# EAGLE board SparkFun_Qwiic_FS3000-Panel (EAGLE 9.6.2), part 1 of 3
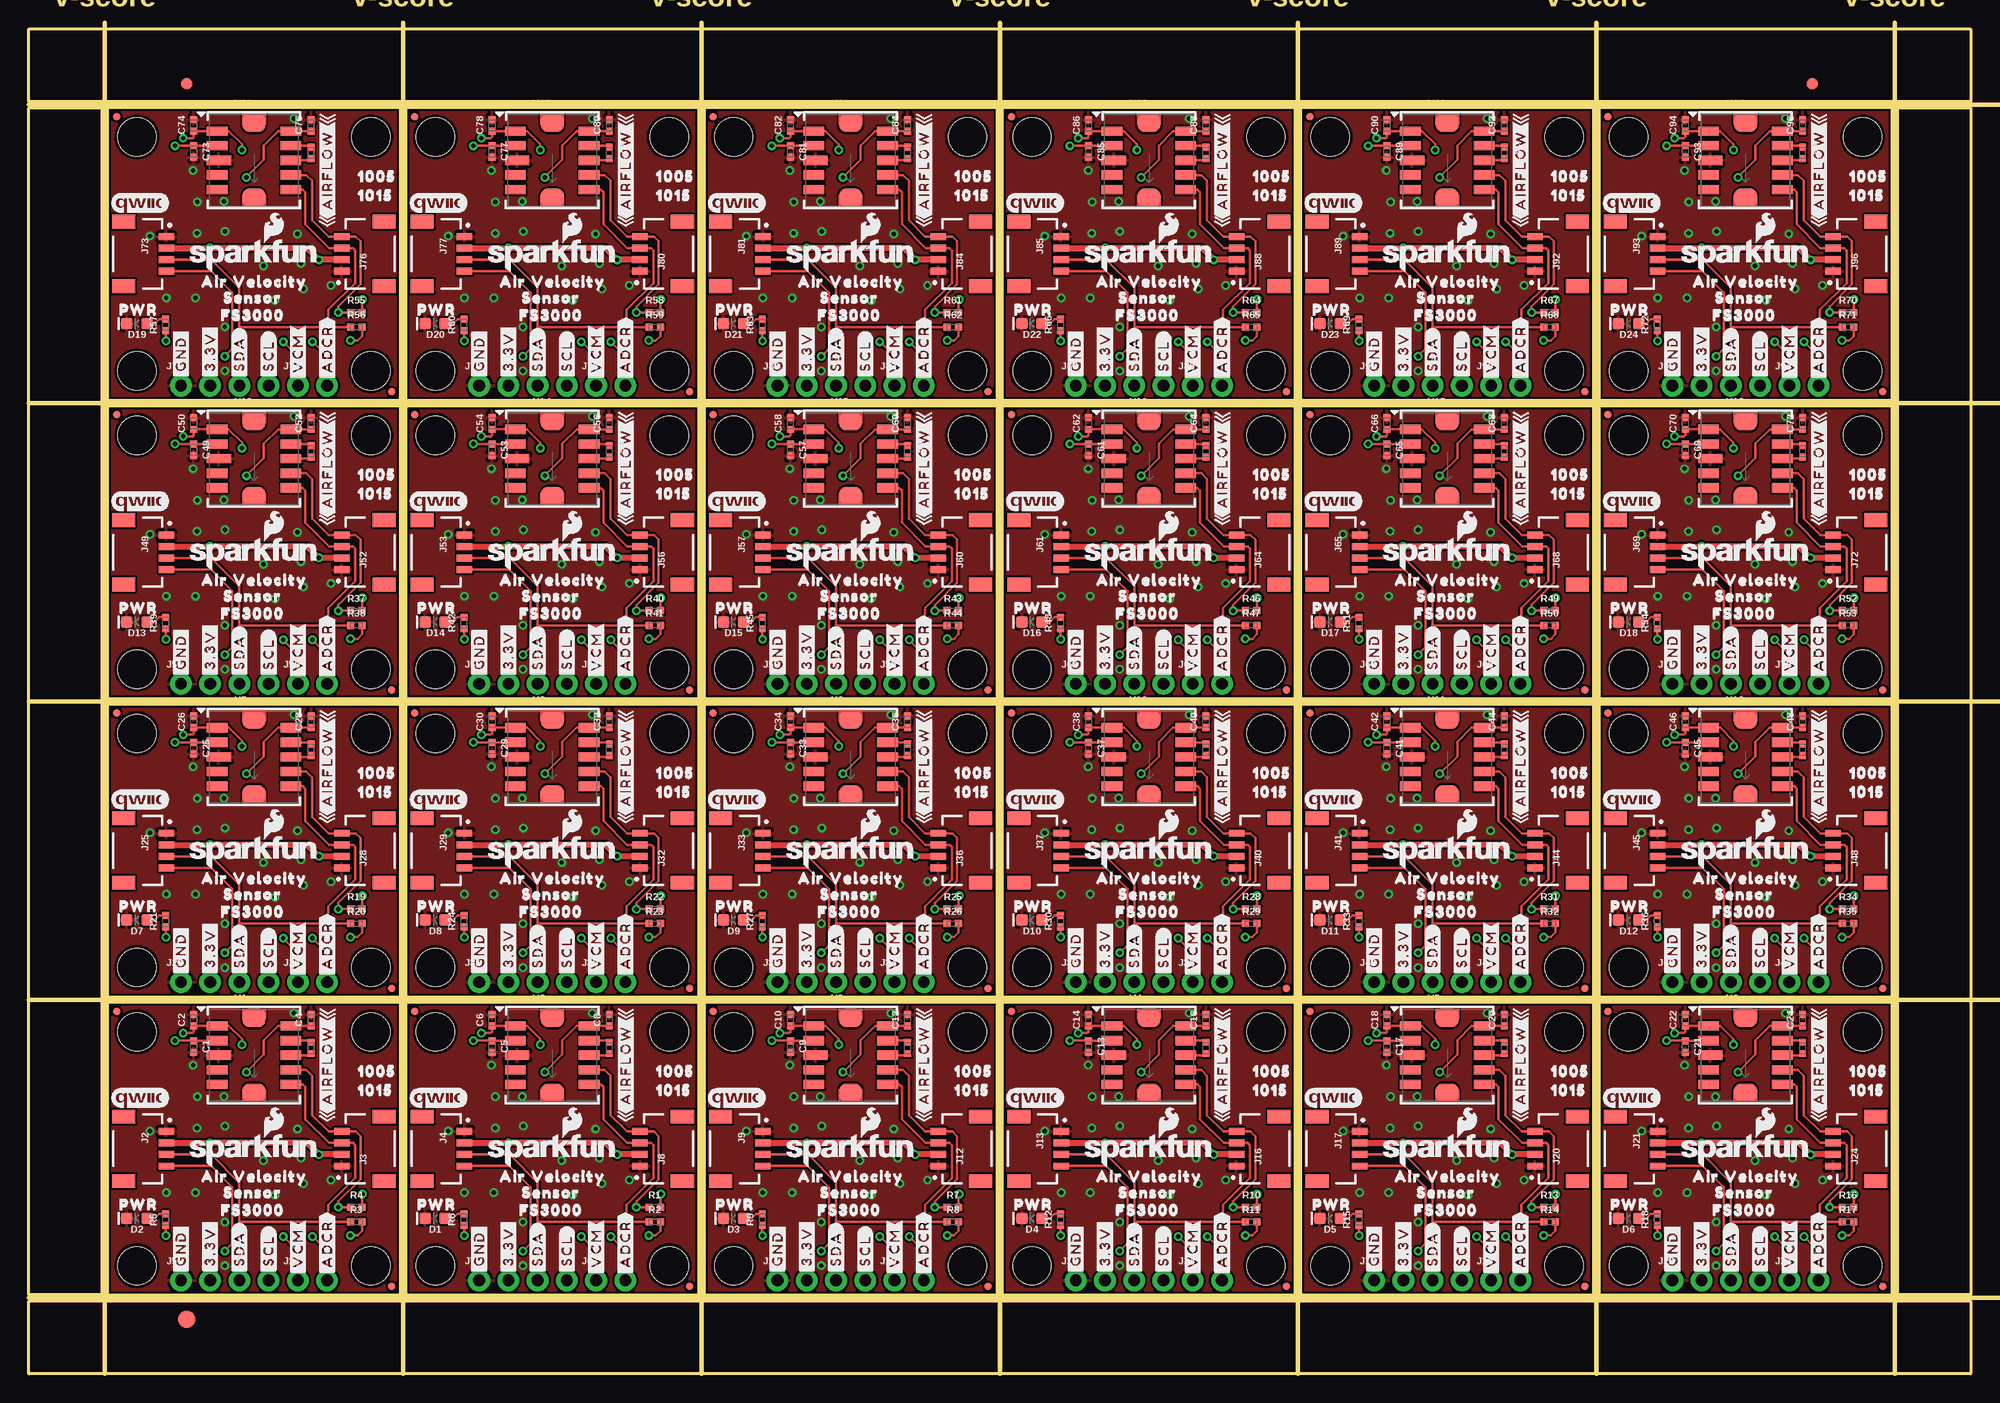
[diagram p0: board, top side]
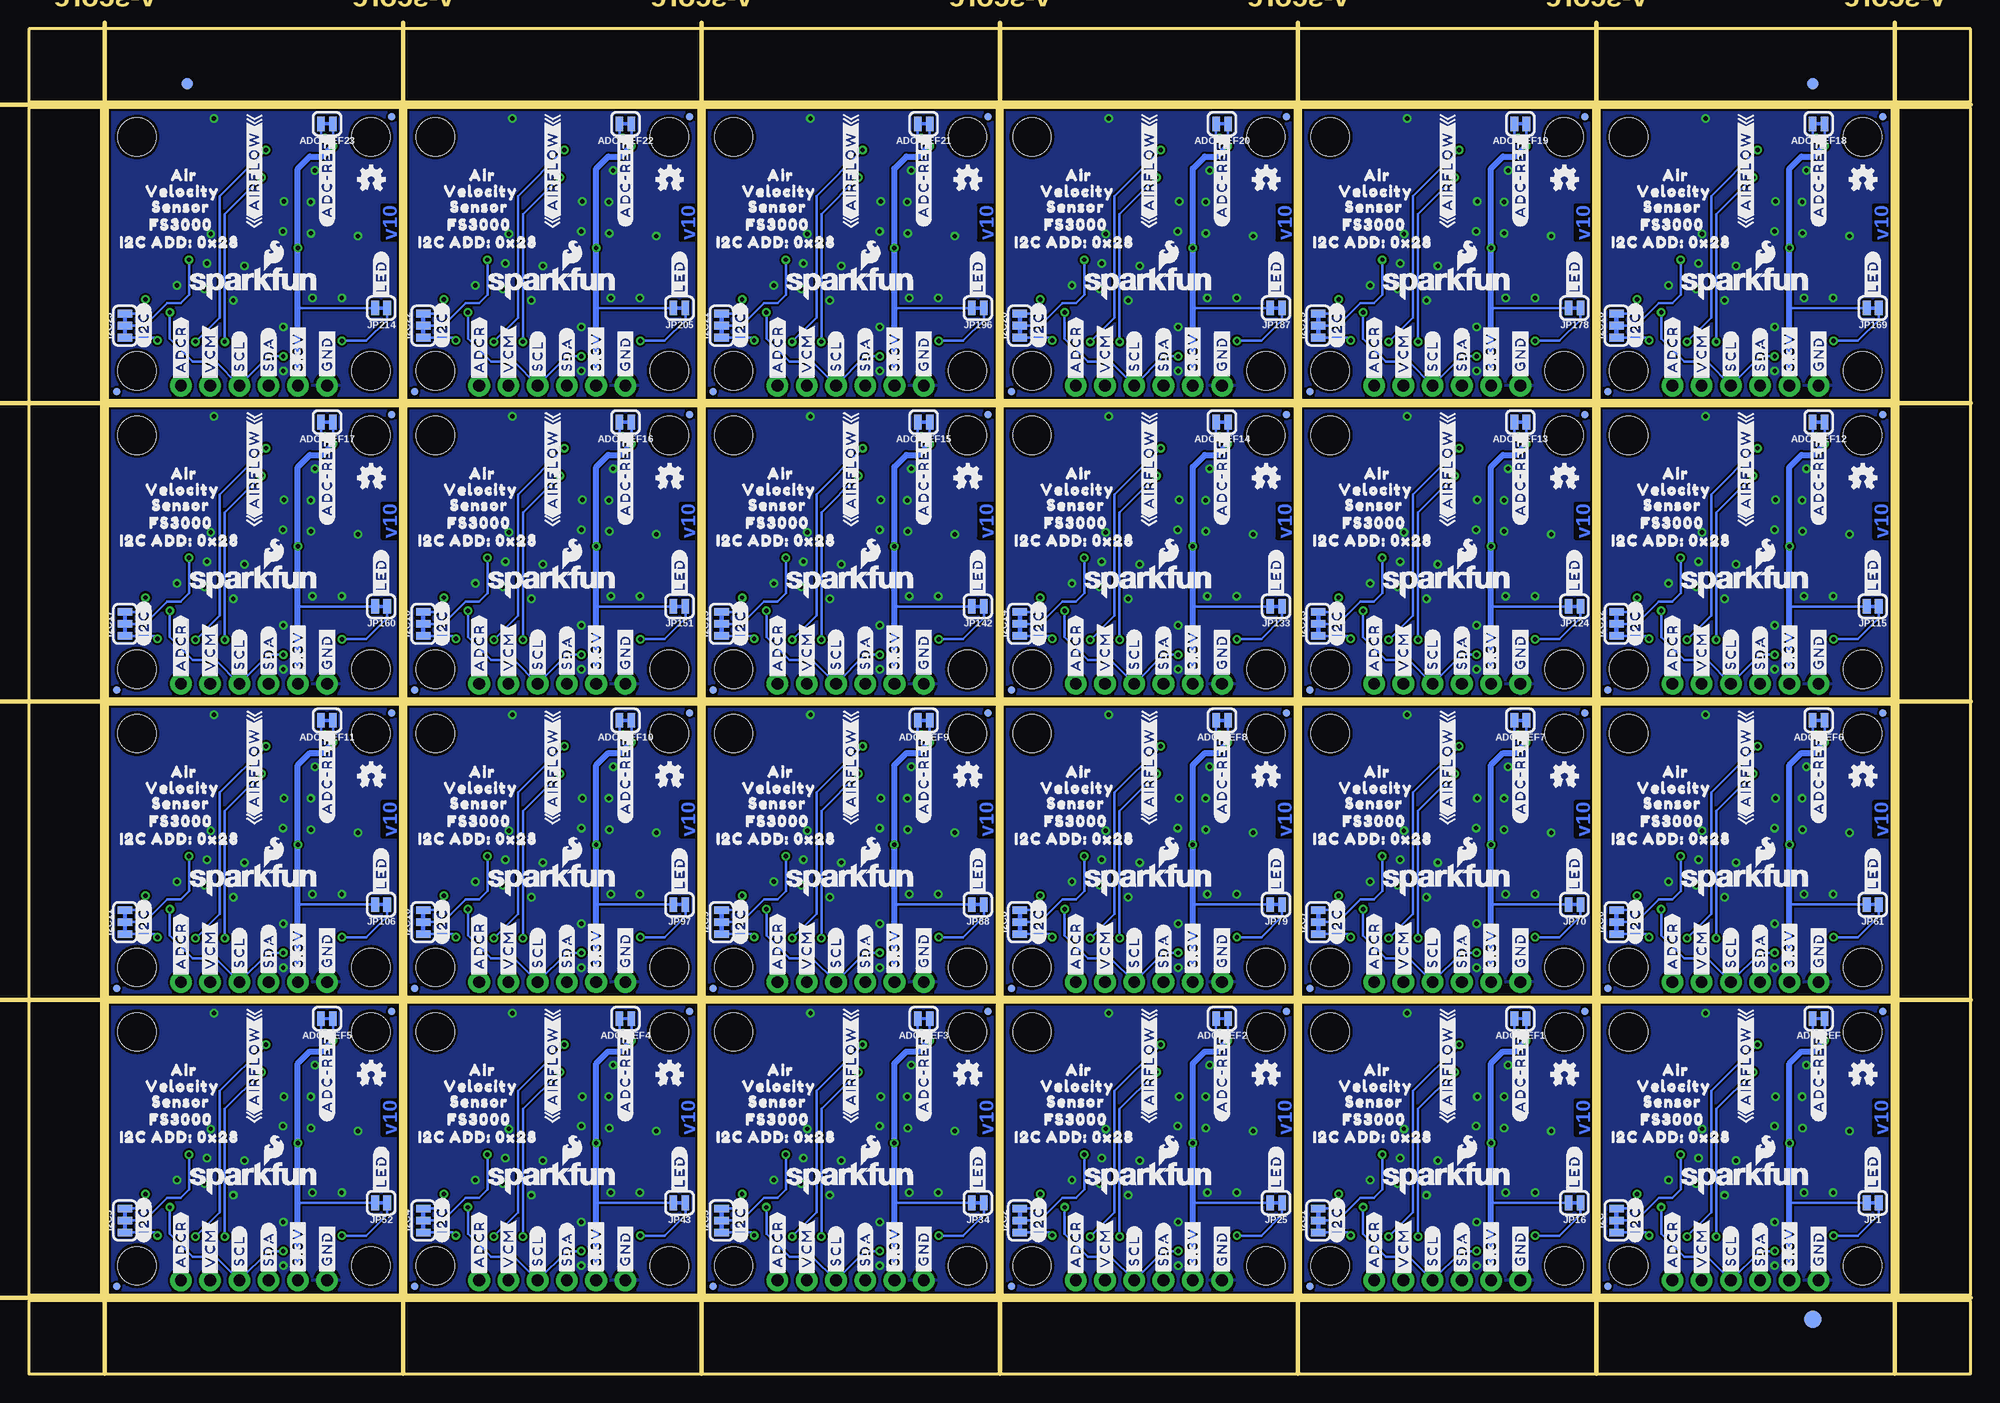
[diagram p1: board, bottom side, seen from below]

Size 168.66 x 116.84 mm. Coordinates in mm from the lower left corner, seen from the top.
Outline: 6.86,6.86 6.86,32.26 32.26,32.26 32.26,6.86 6.86,6.86
Outline: 32.77,6.86 32.77,32.26 58.17,32.26 58.17,6.86 32.77,6.86
Outline: 58.67,6.86 58.67,32.26 84.07,32.26 84.07,6.86 58.67,6.86
Outline: 84.58,6.86 84.58,32.26 109.98,32.26 109.98,6.86 84.58,6.86
Outline: 110.49,6.86 110.49,32.26 135.89,32.26 135.89,6.86 110.49,6.86
Outline: 136.4,6.86 136.4,32.26 161.8,32.26 161.8,6.86 136.4,6.86
Outline: 6.86,32.77 6.86,58.17 32.26,58.17 32.26,32.77 6.86,32.77
Outline: 32.77,32.77 32.77,58.17 58.17,58.17 58.17,32.77 32.77,32.77
Outline: 58.67,32.77 58.67,58.17 84.07,58.17 84.07,32.77 58.67,32.77
Outline: 84.58,32.77 84.58,58.17 109.98,58.17 109.98,32.77 84.58,32.77
Outline: 110.49,32.77 110.49,58.17 135.89,58.17 135.89,32.77 110.49,32.77
Outline: 136.4,32.77 136.4,58.17 161.8,58.17 161.8,32.77 136.4,32.77
Outline: 6.86,58.67 6.86,84.07 32.26,84.07 32.26,58.67 6.86,58.67
Outline: 32.77,58.67 32.77,84.07 58.17,84.07 58.17,58.67 32.77,58.67
Outline: 58.67,58.67 58.67,84.07 84.07,84.07 84.07,58.67 58.67,58.67
Outline: 84.58,58.67 84.58,84.07 109.98,84.07 109.98,58.67 84.58,58.67
Outline: 110.49,58.67 110.49,84.07 135.89,84.07 135.89,58.67 110.49,58.67
Outline: 136.4,58.67 136.4,84.07 161.8,84.07 161.8,58.67 136.4,58.67
Outline: 6.86,84.58 6.86,109.98 32.26,109.98 32.26,84.58 6.86,84.58
Outline: 32.77,84.58 32.77,109.98 58.17,109.98 58.17,84.58 32.77,84.58
Outline: 58.67,84.58 58.67,109.98 84.07,109.98 84.07,84.58 58.67,84.58
Outline: 84.58,84.58 84.58,109.98 109.98,109.98 109.98,84.58 84.58,84.58
Outline: 110.49,84.58 110.49,109.98 135.89,109.98 135.89,84.58 110.49,84.58
Outline: 136.4,84.58 136.4,109.98 161.8,109.98 161.8,84.58 136.4,84.58
Outline: 0,6.35 168.66,6.35 168.66,0 0,0 0,6.35
Outline: 162.31,109.98 168.66,109.98 168.66,6.86 162.31,6.86 162.31,109.98
Outline: 0,116.84 168.66,116.84 168.66,110.49 0,110.49 0,116.84
Outline: 0,109.98 6.35,109.98 6.35,6.86 0,6.86 0,109.98
Copper layers (1*16): Top 0.035mm / dielectric 1.5mm / Bottom 0.035mm
Design rules "SparkFun_Qwiic_FS3000": minimum track width 7mil, minimum drill 0.3mm, track to track 7mil, track to pad 7mil, pad to pad 7mil, via to via 7mil, smd to smd 7mil, copper to edge 7mil, drill to drill 7mil, minimum pad ring 7mil, minimum via ring 7mil, stop-mask expansion 3mil, vias tented up to drill 25mil, thermal gap 10mil
Milling: 12 lines

## Footprints (pad centres in the part's own frame; a part is rotated, then mirrored left to right if it is on the bottom)
SMT-JUMPER_2_NC_TRACE_SILK = smd 0.66 x 1.27: 1 -0.521,0; 2 0.521,0
0402-TIGHT = smd 0.6 x 0.6: 1 -0.5,0; 2 0.5,0
LED-0603 = smd 1 x 1: A -0.877,0; C 0.877,0
FIDUCIAL-1X2 = smd 1 x 1: 1 0,0
FIDUCIAL-1.5X3 = smd 1.5 x 1.5: 1 0,0
SMT-JUMPER_3_2-NC_TRACE_SILK = smd 0.66 x 1.27: 1 -1.041,0; 2 0,0; 3 1.041,0
1X02_NO_SILK = drill 1.016 pad 1.88: 1 0,0; 2 2.54,0
JST04_1MM_RA = smd 0.6 x 1.35: 1 -1.5,0; 2 -0.5,0; 3 0.5,0; 4 1.5,0 | smd 1.2 x 2: NC1 2.8,-3.675; NC2 -2.8,-3.675
1X04_NO_SILK = drill 1.016 pad 1.88: 1 0,0; 2 2.54,0; 3 5.08,0; 4 7.62,0
FIDUCIAL-MICRO = smd 0.635 x 0.635: 1 0,0
STAND-OFF = hole 3.302: 0,0
FS3000 = smd 1.8 x 0.8: 1 -3.2,2.54; 2 -3.2,1.27; 4 -3.2,-1.27; 5 -3.2,-2.54; 6 3.2,-2.54; 7 3.2,-1.27; 8 3.2,0; 9 3.2,1.27; 10 3.2,2.54 | smd 2.1 x 0.8: 3 -3.05,0 | smd 2 x 1.59: 11 0,-3.24; 12 0,3.24

## Placement (x,y rotation side)
ADC-REF  [SMT-JUMPER_2_NC_TRACE_SILK]  13.21,30.86 180 bottom
ADC-REF1  [SMT-JUMPER_2_NC_TRACE_SILK]  39.12,30.86 180 bottom
ADC-REF2  [SMT-JUMPER_2_NC_TRACE_SILK]  65.02,30.86 180 bottom
ADC-REF3  [SMT-JUMPER_2_NC_TRACE_SILK]  90.93,30.86 180 bottom
ADC-REF4  [SMT-JUMPER_2_NC_TRACE_SILK]  116.84,30.86 180 bottom
ADC-REF5  [SMT-JUMPER_2_NC_TRACE_SILK]  142.75,30.86 180 bottom
ADC-REF6  [SMT-JUMPER_2_NC_TRACE_SILK]  13.21,56.77 180 bottom
ADC-REF7  [SMT-JUMPER_2_NC_TRACE_SILK]  39.12,56.77 180 bottom
ADC-REF8  [SMT-JUMPER_2_NC_TRACE_SILK]  65.02,56.77 180 bottom
ADC-REF9  [SMT-JUMPER_2_NC_TRACE_SILK]  90.93,56.77 180 bottom
ADC-REF10  [SMT-JUMPER_2_NC_TRACE_SILK]  116.84,56.77 180 bottom
ADC-REF11  [SMT-JUMPER_2_NC_TRACE_SILK]  142.75,56.77 180 bottom
ADC-REF12  [SMT-JUMPER_2_NC_TRACE_SILK]  13.21,82.68 180 bottom
ADC-REF13  [SMT-JUMPER_2_NC_TRACE_SILK]  39.12,82.68 180 bottom
ADC-REF14  [SMT-JUMPER_2_NC_TRACE_SILK]  65.02,82.68 180 bottom
ADC-REF15  [SMT-JUMPER_2_NC_TRACE_SILK]  90.93,82.68 180 bottom
ADC-REF16  [SMT-JUMPER_2_NC_TRACE_SILK]  116.84,82.68 180 bottom
ADC-REF17  [SMT-JUMPER_2_NC_TRACE_SILK]  142.75,82.68 180 bottom
ADC-REF18  [SMT-JUMPER_2_NC_TRACE_SILK]  13.21,108.59 180 bottom
ADC-REF19  [SMT-JUMPER_2_NC_TRACE_SILK]  39.12,108.59 180 bottom
ADC-REF20  [SMT-JUMPER_2_NC_TRACE_SILK]  65.02,108.59 180 bottom
ADC-REF21  [SMT-JUMPER_2_NC_TRACE_SILK]  90.93,108.59 180 bottom
ADC-REF22  [SMT-JUMPER_2_NC_TRACE_SILK]  116.84,108.59 180 bottom
ADC-REF23  [SMT-JUMPER_2_NC_TRACE_SILK]  142.75,108.59 180 bottom
C1  0.1uF  [0402-TIGHT]  14.33,28.45 270 top
C2  0.1uF  [0402-TIGHT]  14.33,30.73 90 top
C3  0.1uF  [0402-TIGHT]  24.51,28.32 270 top
C4  1.0uF  [0402-TIGHT]  24.51,30.73 90 top
C5  0.1uF  [0402-TIGHT]  40.23,28.45 270 top
C6  0.1uF  [0402-TIGHT]  40.23,30.73 90 top
C7  0.1uF  [0402-TIGHT]  50.42,28.32 270 top
C8  1.0uF  [0402-TIGHT]  50.42,30.73 90 top
C9  0.1uF  [0402-TIGHT]  66.14,28.45 270 top
C10  0.1uF  [0402-TIGHT]  66.14,30.73 90 top
C11  0.1uF  [0402-TIGHT]  76.33,28.32 270 top
C12  1.0uF  [0402-TIGHT]  76.33,30.73 90 top
C13  0.1uF  [0402-TIGHT]  92.05,28.45 270 top
C14  0.1uF  [0402-TIGHT]  92.05,30.73 90 top
C15  0.1uF  [0402-TIGHT]  102.23,28.32 270 top
C16  1.0uF  [0402-TIGHT]  102.23,30.73 90 top
C17  0.1uF  [0402-TIGHT]  117.96,28.45 270 top
C18  0.1uF  [0402-TIGHT]  117.96,30.73 90 top
C19  0.1uF  [0402-TIGHT]  128.14,28.32 270 top
C20  1.0uF  [0402-TIGHT]  128.14,30.73 90 top
C21  0.1uF  [0402-TIGHT]  143.87,28.45 270 top
C22  0.1uF  [0402-TIGHT]  143.87,30.73 90 top
C23  0.1uF  [0402-TIGHT]  154.05,28.32 270 top
C24  1.0uF  [0402-TIGHT]  154.05,30.73 90 top
C25  0.1uF  [0402-TIGHT]  14.33,54.36 270 top
C26  0.1uF  [0402-TIGHT]  14.33,56.64 90 top
C27  0.1uF  [0402-TIGHT]  24.51,54.23 270 top
C28  1.0uF  [0402-TIGHT]  24.51,56.64 90 top
C29  0.1uF  [0402-TIGHT]  40.23,54.36 270 top
C30  0.1uF  [0402-TIGHT]  40.23,56.64 90 top
C31  0.1uF  [0402-TIGHT]  50.42,54.23 270 top
C32  1.0uF  [0402-TIGHT]  50.42,56.64 90 top
C33  0.1uF  [0402-TIGHT]  66.14,54.36 270 top
C34  0.1uF  [0402-TIGHT]  66.14,56.64 90 top
C35  0.1uF  [0402-TIGHT]  76.33,54.23 270 top
C36  1.0uF  [0402-TIGHT]  76.33,56.64 90 top
C37  0.1uF  [0402-TIGHT]  92.05,54.36 270 top
C38  0.1uF  [0402-TIGHT]  92.05,56.64 90 top
C39  0.1uF  [0402-TIGHT]  102.23,54.23 270 top
C40  1.0uF  [0402-TIGHT]  102.23,56.64 90 top
C41  0.1uF  [0402-TIGHT]  117.96,54.36 270 top
C42  0.1uF  [0402-TIGHT]  117.96,56.64 90 top
C43  0.1uF  [0402-TIGHT]  128.14,54.23 270 top
C44  1.0uF  [0402-TIGHT]  128.14,56.64 90 top
C45  0.1uF  [0402-TIGHT]  143.87,54.36 270 top
C46  0.1uF  [0402-TIGHT]  143.87,56.64 90 top
C47  0.1uF  [0402-TIGHT]  154.05,54.23 270 top
C48  1.0uF  [0402-TIGHT]  154.05,56.64 90 top
C49  0.1uF  [0402-TIGHT]  14.33,80.26 270 top
C50  0.1uF  [0402-TIGHT]  14.33,82.55 90 top
C51  0.1uF  [0402-TIGHT]  24.51,80.14 270 top
C52  1.0uF  [0402-TIGHT]  24.51,82.55 90 top
C53  0.1uF  [0402-TIGHT]  40.23,80.26 270 top
C54  0.1uF  [0402-TIGHT]  40.23,82.55 90 top
C55  0.1uF  [0402-TIGHT]  50.42,80.14 270 top
C56  1.0uF  [0402-TIGHT]  50.42,82.55 90 top
C57  0.1uF  [0402-TIGHT]  66.14,80.26 270 top
C58  0.1uF  [0402-TIGHT]  66.14,82.55 90 top
C59  0.1uF  [0402-TIGHT]  76.33,80.14 270 top
C60  1.0uF  [0402-TIGHT]  76.33,82.55 90 top
C61  0.1uF  [0402-TIGHT]  92.05,80.26 270 top
C62  0.1uF  [0402-TIGHT]  92.05,82.55 90 top
C63  0.1uF  [0402-TIGHT]  102.23,80.14 270 top
C64  1.0uF  [0402-TIGHT]  102.23,82.55 90 top
C65  0.1uF  [0402-TIGHT]  117.96,80.26 270 top
C66  0.1uF  [0402-TIGHT]  117.96,82.55 90 top
C67  0.1uF  [0402-TIGHT]  128.14,80.14 270 top
C68  1.0uF  [0402-TIGHT]  128.14,82.55 90 top
C69  0.1uF  [0402-TIGHT]  143.87,80.26 270 top
C70  0.1uF  [0402-TIGHT]  143.87,82.55 90 top
C71  0.1uF  [0402-TIGHT]  154.05,80.14 270 top
C72  1.0uF  [0402-TIGHT]  154.05,82.55 90 top
C73  0.1uF  [0402-TIGHT]  14.33,106.17 270 top
C74  0.1uF  [0402-TIGHT]  14.33,108.46 90 top
C75  0.1uF  [0402-TIGHT]  24.51,106.05 270 top
C76  1.0uF  [0402-TIGHT]  24.51,108.46 90 top
C77  0.1uF  [0402-TIGHT]  40.23,106.17 270 top
C78  0.1uF  [0402-TIGHT]  40.23,108.46 90 top
C79  0.1uF  [0402-TIGHT]  50.42,106.05 270 top
C80  1.0uF  [0402-TIGHT]  50.42,108.46 90 top
C81  0.1uF  [0402-TIGHT]  66.14,106.17 270 top
C82  0.1uF  [0402-TIGHT]  66.14,108.46 90 top
C83  0.1uF  [0402-TIGHT]  76.33,106.05 270 top
C84  1.0uF  [0402-TIGHT]  76.33,108.46 90 top
C85  0.1uF  [0402-TIGHT]  92.05,106.17 270 top
C86  0.1uF  [0402-TIGHT]  92.05,108.46 90 top
C87  0.1uF  [0402-TIGHT]  102.23,106.05 270 top
C88  1.0uF  [0402-TIGHT]  102.23,108.46 90 top
C89  0.1uF  [0402-TIGHT]  117.96,106.17 270 top
C90  0.1uF  [0402-TIGHT]  117.96,108.46 90 top
C91  0.1uF  [0402-TIGHT]  128.14,106.05 270 top
C92  1.0uF  [0402-TIGHT]  128.14,108.46 90 top
C93  0.1uF  [0402-TIGHT]  143.87,106.17 270 top
C94  0.1uF  [0402-TIGHT]  143.87,108.46 90 top
C95  0.1uF  [0402-TIGHT]  154.05,106.05 270 top
C96  1.0uF  [0402-TIGHT]  154.05,108.46 90 top
D1  RED  [LED-0603]  35.31,13.51 180 top
D2  RED  [LED-0603]  9.4,13.51 180 top
D3  RED  [LED-0603]  61.21,13.51 180 top
D4  RED  [LED-0603]  87.12,13.51 180 top
D5  RED  [LED-0603]  113.03,13.51 180 top
D6  RED  [LED-0603]  138.94,13.51 180 top
D7  RED  [LED-0603]  9.4,39.42 180 top
D8  RED  [LED-0603]  35.31,39.42 180 top
D9  RED  [LED-0603]  61.21,39.42 180 top
D10  RED  [LED-0603]  87.12,39.42 180 top
D11  RED  [LED-0603]  113.03,39.42 180 top
D12  RED  [LED-0603]  138.94,39.42 180 top
D13  RED  [LED-0603]  9.4,65.33 180 top
D14  RED  [LED-0603]  35.31,65.33 180 top
D15  RED  [LED-0603]  61.21,65.33 180 top
D16  RED  [LED-0603]  87.12,65.33 180 top
D17  RED  [LED-0603]  113.03,65.33 180 top
D18  RED  [LED-0603]  138.94,65.33 180 top
D19  RED  [LED-0603]  9.4,91.24 180 top
D20  RED  [LED-0603]  35.31,91.24 180 top
D21  RED  [LED-0603]  61.21,91.24 180 top
D22  RED  [LED-0603]  87.12,91.24 180 top
D23  RED  [LED-0603]  113.03,91.24 180 top
D24  RED  [LED-0603]  138.94,91.24 180 top
E$1  [FIDUCIAL-1X2]  13.72,112.08 0 top
E$2  [FIDUCIAL-1X2]  13.72,112.08 0 bottom
E$3  [FIDUCIAL-1X2]  154.88,112.08 0 top
E$4  [FIDUCIAL-1X2]  154.88,112.08 0 bottom
E$5  [FIDUCIAL-1.5X3]  13.72,4.76 0 top
E$6  [FIDUCIAL-1.5X3]  13.72,4.76 0 bottom
I2C  [SMT-JUMPER_3_2-NC_TRACE_SILK]  30.76,13.34 90 bottom
I2C1  [SMT-JUMPER_3_2-NC_TRACE_SILK]  56.67,13.34 90 bottom
I2C2  [SMT-JUMPER_3_2-NC_TRACE_SILK]  82.58,13.34 90 bottom
I2C3  [SMT-JUMPER_3_2-NC_TRACE_SILK]  108.48,13.34 90 bottom
I2C4  [SMT-JUMPER_3_2-NC_TRACE_SILK]  134.39,13.34 90 bottom
I2C5  [SMT-JUMPER_3_2-NC_TRACE_SILK]  160.3,13.34 90 bottom
I2C6  [SMT-JUMPER_3_2-NC_TRACE_SILK]  30.76,39.24 90 bottom
I2C7  [SMT-JUMPER_3_2-NC_TRACE_SILK]  56.67,39.24 90 bottom
I2C8  [SMT-JUMPER_3_2-NC_TRACE_SILK]  82.58,39.24 90 bottom
I2C9  [SMT-JUMPER_3_2-NC_TRACE_SILK]  108.48,39.24 90 bottom
I2C10  [SMT-JUMPER_3_2-NC_TRACE_SILK]  134.39,39.24 90 bottom
I2C11  [SMT-JUMPER_3_2-NC_TRACE_SILK]  160.3,39.24 90 bottom
I2C12  [SMT-JUMPER_3_2-NC_TRACE_SILK]  30.76,65.15 90 bottom
I2C13  [SMT-JUMPER_3_2-NC_TRACE_SILK]  56.67,65.15 90 bottom
I2C14  [SMT-JUMPER_3_2-NC_TRACE_SILK]  82.58,65.15 90 bottom
I2C15  [SMT-JUMPER_3_2-NC_TRACE_SILK]  108.48,65.15 90 bottom
I2C16  [SMT-JUMPER_3_2-NC_TRACE_SILK]  134.39,65.15 90 bottom
I2C17  [SMT-JUMPER_3_2-NC_TRACE_SILK]  160.3,65.15 90 bottom
I2C18  [SMT-JUMPER_3_2-NC_TRACE_SILK]  30.76,91.06 90 bottom
I2C19  [SMT-JUMPER_3_2-NC_TRACE_SILK]  56.67,91.06 90 bottom
I2C20  [SMT-JUMPER_3_2-NC_TRACE_SILK]  82.58,91.06 90 bottom
I2C21  [SMT-JUMPER_3_2-NC_TRACE_SILK]  108.48,91.06 90 bottom
I2C22  [SMT-JUMPER_3_2-NC_TRACE_SILK]  134.39,91.06 90 bottom
I2C23  [SMT-JUMPER_3_2-NC_TRACE_SILK]  160.3,91.06 90 bottom
J1  [1X02_NO_SILK]  23.37,8.13 0 top
J2  QWIIC_RA  [JST04_1MM_RA]  11.94,19.56 270 top
J3  QWIIC_RA  [JST04_1MM_RA]  27.18,19.56 90 top
J4  QWIIC_RA  [JST04_1MM_RA]  37.85,19.56 270 top
J5  [1X04_NO_SILK]  13.21,8.13 0 top
J6  [1X02_NO_SILK]  49.28,8.13 0 top
J7  [1X04_NO_SILK]  39.12,8.13 0 top
J8  QWIIC_RA  [JST04_1MM_RA]  53.09,19.56 90 top
J9  QWIIC_RA  [JST04_1MM_RA]  63.75,19.56 270 top
J10  [1X02_NO_SILK]  75.18,8.13 0 top
J11  [1X04_NO_SILK]  65.02,8.13 0 top
J12  QWIIC_RA  [JST04_1MM_RA]  78.99,19.56 90 top
J13  QWIIC_RA  [JST04_1MM_RA]  89.66,19.56 270 top
J14  [1X02_NO_SILK]  101.09,8.13 0 top
J15  [1X04_NO_SILK]  90.93,8.13 0 top
J16  QWIIC_RA  [JST04_1MM_RA]  104.9,19.56 90 top
J17  QWIIC_RA  [JST04_1MM_RA]  115.57,19.56 270 top
J18  [1X02_NO_SILK]  127,8.13 0 top
J19  [1X04_NO_SILK]  116.84,8.13 0 top
J20  QWIIC_RA  [JST04_1MM_RA]  130.81,19.56 90 top
J21  QWIIC_RA  [JST04_1MM_RA]  141.48,19.56 270 top
J22  [1X02_NO_SILK]  152.91,8.13 0 top
J23  [1X04_NO_SILK]  142.75,8.13 0 top
J24  QWIIC_RA  [JST04_1MM_RA]  156.72,19.56 90 top
J25  QWIIC_RA  [JST04_1MM_RA]  11.94,45.47 270 top
J26  [1X02_NO_SILK]  23.37,34.04 0 top
J27  [1X04_NO_SILK]  13.21,34.04 0 top
J28  QWIIC_RA  [JST04_1MM_RA]  27.18,45.47 90 top
J29  QWIIC_RA  [JST04_1MM_RA]  37.85,45.47 270 top
J30  [1X02_NO_SILK]  49.28,34.04 0 top
J31  [1X04_NO_SILK]  39.12,34.04 0 top
J32  QWIIC_RA  [JST04_1MM_RA]  53.09,45.47 90 top
J33  QWIIC_RA  [JST04_1MM_RA]  63.75,45.47 270 top
J34  [1X02_NO_SILK]  75.18,34.04 0 top
J35  [1X04_NO_SILK]  65.02,34.04 0 top
J36  QWIIC_RA  [JST04_1MM_RA]  78.99,45.47 90 top
J37  QWIIC_RA  [JST04_1MM_RA]  89.66,45.47 270 top
J38  [1X02_NO_SILK]  101.09,34.04 0 top
J39  [1X04_NO_SILK]  90.93,34.04 0 top
J40  QWIIC_RA  [JST04_1MM_RA]  104.9,45.47 90 top
J41  QWIIC_RA  [JST04_1MM_RA]  115.57,45.47 270 top
J42  [1X02_NO_SILK]  127,34.04 0 top
J43  [1X04_NO_SILK]  116.84,34.04 0 top
J44  QWIIC_RA  [JST04_1MM_RA]  130.81,45.47 90 top
J45  QWIIC_RA  [JST04_1MM_RA]  141.48,45.47 270 top
J46  [1X02_NO_SILK]  152.91,34.04 0 top
J47  [1X04_NO_SILK]  142.75,34.04 0 top
J48  QWIIC_RA  [JST04_1MM_RA]  156.72,45.47 90 top
J49  QWIIC_RA  [JST04_1MM_RA]  11.94,71.37 270 top
J50  [1X02_NO_SILK]  23.37,59.94 0 top
J51  [1X04_NO_SILK]  13.21,59.94 0 top
J52  QWIIC_RA  [JST04_1MM_RA]  27.18,71.37 90 top
J53  QWIIC_RA  [JST04_1MM_RA]  37.85,71.37 270 top
J54  [1X02_NO_SILK]  49.28,59.94 0 top
J55  [1X04_NO_SILK]  39.12,59.94 0 top
J56  QWIIC_RA  [JST04_1MM_RA]  53.09,71.37 90 top
J57  QWIIC_RA  [JST04_1MM_RA]  63.75,71.37 270 top
J58  [1X02_NO_SILK]  75.18,59.94 0 top
J59  [1X04_NO_SILK]  65.02,59.94 0 top
J60  QWIIC_RA  [JST04_1MM_RA]  78.99,71.37 90 top
J61  QWIIC_RA  [JST04_1MM_RA]  89.66,71.37 270 top
J62  [1X02_NO_SILK]  101.09,59.94 0 top
J63  [1X04_NO_SILK]  90.93,59.94 0 top
J64  QWIIC_RA  [JST04_1MM_RA]  104.9,71.37 90 top
J65  QWIIC_RA  [JST04_1MM_RA]  115.57,71.37 270 top
J66  [1X02_NO_SILK]  127,59.94 0 top
J67  [1X04_NO_SILK]  116.84,59.94 0 top
J68  QWIIC_RA  [JST04_1MM_RA]  130.81,71.37 90 top
J69  QWIIC_RA  [JST04_1MM_RA]  141.48,71.37 270 top
J70  [1X02_NO_SILK]  152.91,59.94 0 top
J71  [1X04_NO_SILK]  142.75,59.94 0 top
J72  QWIIC_RA  [JST04_1MM_RA]  156.72,71.37 90 top
J73  QWIIC_RA  [JST04_1MM_RA]  11.94,97.28 270 top
J74  [1X02_NO_SILK]  23.37,85.85 0 top
J75  [1X04_NO_SILK]  13.21,85.85 0 top
J76  QWIIC_RA  [JST04_1MM_RA]  27.18,97.28 90 top
J77  QWIIC_RA  [JST04_1MM_RA]  37.85,97.28 270 top
J78  [1X02_NO_SILK]  49.28,85.85 0 top
J79  [1X04_NO_SILK]  39.12,85.85 0 top
J80  QWIIC_RA  [JST04_1MM_RA]  53.09,97.28 90 top
J81  QWIIC_RA  [JST04_1MM_RA]  63.75,97.28 270 top
J82  [1X02_NO_SILK]  75.18,85.85 0 top
J83  [1X04_NO_SILK]  65.02,85.85 0 top
J84  QWIIC_RA  [JST04_1MM_RA]  78.99,97.28 90 top
J85  QWIIC_RA  [JST04_1MM_RA]  89.66,97.28 270 top
J86  [1X02_NO_SILK]  101.09,85.85 0 top
J87  [1X04_NO_SILK]  90.93,85.85 0 top
J88  QWIIC_RA  [JST04_1MM_RA]  104.9,97.28 90 top
J89  QWIIC_RA  [JST04_1MM_RA]  115.57,97.28 270 top
J90  [1X02_NO_SILK]  127,85.85 0 top
J91  [1X04_NO_SILK]  116.84,85.85 0 top
J92  QWIIC_RA  [JST04_1MM_RA]  130.81,97.28 90 top
J93  QWIIC_RA  [JST04_1MM_RA]  141.48,97.28 270 top
J94  [1X02_NO_SILK]  152.91,85.85 0 top
J95  [1X04_NO_SILK]  142.75,85.85 0 top
J96  QWIIC_RA  [JST04_1MM_RA]  156.72,97.28 90 top
JP1  LED  [SMT-JUMPER_2_NC_TRACE_SILK]  8.51,14.86 180 bottom
JP2  FIDUCIALUFIDUCIAL  [FIDUCIAL-MICRO]  31.5,7.59 0 top
JP3  STAND-OFF  [STAND-OFF]  9.4,29.72 0 top
JP4  STAND-OFF  [STAND-OFF]  29.72,29.72 0 top
JP5  FIDUCIALUFIDUCIAL  [FIDUCIAL-MICRO]  7.62,31.5 0 bottom
JP6  FIDUCIALUFIDUCIAL  [FIDUCIAL-MICRO]  7.62,31.5 0 top
JP7  STAND-OFF  [STAND-OFF]  29.72,9.4 0 top
JP8  STAND-OFF  [STAND-OFF]  9.4,9.4 0 top
JP9  STAND-OFF  [STAND-OFF]  35.31,29.72 0 top
JP10  FIDUCIALUFIDUCIAL  [FIDUCIAL-MICRO]  57.4,7.59 0 top
JP11  FIDUCIALUFIDUCIAL  [FIDUCIAL-MICRO]  31.5,7.59 0 bottom
JP12  FIDUCIALUFIDUCIAL  [FIDUCIAL-MICRO]  33.53,31.5 0 top
JP13  FIDUCIALUFIDUCIAL  [FIDUCIAL-MICRO]  57.4,7.59 0 bottom
JP14  FIDUCIALUFIDUCIAL  [FIDUCIAL-MICRO]  33.53,31.5 0 bottom
JP15  STAND-OFF  [STAND-OFF]  35.31,9.4 0 top
JP16  LED  [SMT-JUMPER_2_NC_TRACE_SILK]  34.42,14.86 180 bottom
JP17  STAND-OFF  [STAND-OFF]  55.63,29.72 0 top
JP18  STAND-OFF  [STAND-OFF]  55.63,9.4 0 top
JP19  STAND-OFF  [STAND-OFF]  61.21,29.72 0 top
JP20  FIDUCIALUFIDUCIAL  [FIDUCIAL-MICRO]  83.31,7.59 0 top
JP21  FIDUCIALUFIDUCIAL  [FIDUCIAL-MICRO]  59.44,31.5 0 top
JP22  FIDUCIALUFIDUCIAL  [FIDUCIAL-MICRO]  83.31,7.59 0 bottom
JP23  FIDUCIALUFIDUCIAL  [FIDUCIAL-MICRO]  59.44,31.5 0 bottom
JP24  STAND-OFF  [STAND-OFF]  61.21,9.4 0 top
JP25  LED  [SMT-JUMPER_2_NC_TRACE_SILK]  60.32,14.86 180 bottom
JP26  STAND-OFF  [STAND-OFF]  81.53,29.72 0 top
JP27  STAND-OFF  [STAND-OFF]  81.53,9.4 0 top
JP28  STAND-OFF  [STAND-OFF]  87.12,29.72 0 top
JP29  FIDUCIALUFIDUCIAL  [FIDUCIAL-MICRO]  109.22,7.59 0 top
JP30  FIDUCIALUFIDUCIAL  [FIDUCIAL-MICRO]  85.34,31.5 0 top
JP31  FIDUCIALUFIDUCIAL  [FIDUCIAL-MICRO]  109.22,7.59 0 bottom
JP32  FIDUCIALUFIDUCIAL  [FIDUCIAL-MICRO]  85.34,31.5 0 bottom
JP33  STAND-OFF  [STAND-OFF]  87.12,9.4 0 top
JP34  LED  [SMT-JUMPER_2_NC_TRACE_SILK]  86.23,14.86 180 bottom
JP35  STAND-OFF  [STAND-OFF]  107.44,29.72 0 top
JP36  STAND-OFF  [STAND-OFF]  107.44,9.4 0 top
JP37  STAND-OFF  [STAND-OFF]  113.03,29.72 0 top
JP38  FIDUCIALUFIDUCIAL  [FIDUCIAL-MICRO]  135.13,7.59 0 top
JP39  FIDUCIALUFIDUCIAL  [FIDUCIAL-MICRO]  111.25,31.5 0 top
JP40  FIDUCIALUFIDUCIAL  [FIDUCIAL-MICRO]  135.13,7.59 0 bottom
JP41  FIDUCIALUFIDUCIAL  [FIDUCIAL-MICRO]  111.25,31.5 0 bottom
JP42  STAND-OFF  [STAND-OFF]  113.03,9.4 0 top
JP43  LED  [SMT-JUMPER_2_NC_TRACE_SILK]  112.14,14.86 180 bottom
JP44  STAND-OFF  [STAND-OFF]  133.35,29.72 0 top
JP45  STAND-OFF  [STAND-OFF]  133.35,9.4 0 top
JP46  STAND-OFF  [STAND-OFF]  138.94,29.72 0 top
JP47  FIDUCIALUFIDUCIAL  [FIDUCIAL-MICRO]  161.04,7.59 0 top
JP48  FIDUCIALUFIDUCIAL  [FIDUCIAL-MICRO]  137.16,31.5 0 top
JP49  FIDUCIALUFIDUCIAL  [FIDUCIAL-MICRO]  161.04,7.59 0 bottom
JP50  FIDUCIALUFIDUCIAL  [FIDUCIAL-MICRO]  137.16,31.5 0 bottom
JP51  STAND-OFF  [STAND-OFF]  138.94,9.4 0 top
JP52  LED  [SMT-JUMPER_2_NC_TRACE_SILK]  138.05,14.86 180 bottom
JP53  STAND-OFF  [STAND-OFF]  159.26,29.72 0 top
JP54  STAND-OFF  [STAND-OFF]  159.26,9.4 0 top
JP55  STAND-OFF  [STAND-OFF]  9.4,55.63 0 top
JP56  FIDUCIALUFIDUCIAL  [FIDUCIAL-MICRO]  31.5,33.5 0 top
JP57  FIDUCIALUFIDUCIAL  [FIDUCIAL-MICRO]  7.62,57.4 0 top
JP58  FIDUCIALUFIDUCIAL  [FIDUCIAL-MICRO]  31.5,33.5 0 bottom
JP59  FIDUCIALUFIDUCIAL  [FIDUCIAL-MICRO]  7.62,57.4 0 bottom
JP60  STAND-OFF  [STAND-OFF]  9.4,35.31 0 top
JP61  LED  [SMT-JUMPER_2_NC_TRACE_SILK]  8.51,40.77 180 bottom
JP62  STAND-OFF  [STAND-OFF]  29.72,55.63 0 top
JP63  STAND-OFF  [STAND-OFF]  29.72,35.31 0 top
JP64  STAND-OFF  [STAND-OFF]  35.31,55.63 0 top
JP65  FIDUCIALUFIDUCIAL  [FIDUCIAL-MICRO]  57.4,33.5 0 top
JP66  FIDUCIALUFIDUCIAL  [FIDUCIAL-MICRO]  33.53,57.4 0 top
JP67  FIDUCIALUFIDUCIAL  [FIDUCIAL-MICRO]  57.4,33.5 0 bottom
JP68  FIDUCIALUFIDUCIAL  [FIDUCIAL-MICRO]  33.53,57.4 0 bottom
JP69  STAND-OFF  [STAND-OFF]  35.31,35.31 0 top
JP70  LED  [SMT-JUMPER_2_NC_TRACE_SILK]  34.42,40.77 180 bottom
JP71  STAND-OFF  [STAND-OFF]  55.63,55.63 0 top
JP72  STAND-OFF  [STAND-OFF]  55.63,35.31 0 top
JP73  STAND-OFF  [STAND-OFF]  61.21,55.63 0 top
JP74  FIDUCIALUFIDUCIAL  [FIDUCIAL-MICRO]  83.31,33.5 0 top
JP75  FIDUCIALUFIDUCIAL  [FIDUCIAL-MICRO]  59.44,57.4 0 top
JP76  FIDUCIALUFIDUCIAL  [FIDUCIAL-MICRO]  83.31,33.5 0 bottom
JP77  FIDUCIALUFIDUCIAL  [FIDUCIAL-MICRO]  59.44,57.4 0 bottom
JP78  STAND-OFF  [STAND-OFF]  61.21,35.31 0 top
JP79  LED  [SMT-JUMPER_2_NC_TRACE_SILK]  60.32,40.77 180 bottom
JP80  STAND-OFF  [STAND-OFF]  81.53,55.63 0 top
JP81  STAND-OFF  [STAND-OFF]  81.53,35.31 0 top
JP82  STAND-OFF  [STAND-OFF]  87.12,55.63 0 top
JP83  FIDUCIALUFIDUCIAL  [FIDUCIAL-MICRO]  109.22,33.5 0 top
JP84  FIDUCIALUFIDUCIAL  [FIDUCIAL-MICRO]  85.34,57.4 0 top
JP85  FIDUCIALUFIDUCIAL  [FIDUCIAL-MICRO]  109.22,33.5 0 bottom
JP86  FIDUCIALUFIDUCIAL  [FIDUCIAL-MICRO]  85.34,57.4 0 bottom
JP87  STAND-OFF  [STAND-OFF]  87.12,35.31 0 top
JP88  LED  [SMT-JUMPER_2_NC_TRACE_SILK]  86.23,40.77 180 bottom
JP89  STAND-OFF  [STAND-OFF]  107.44,55.63 0 top
JP90  STAND-OFF  [STAND-OFF]  107.44,35.31 0 top
JP91  STAND-OFF  [STAND-OFF]  113.03,55.63 0 top
JP92  FIDUCIALUFIDUCIAL  [FIDUCIAL-MICRO]  135.13,33.5 0 top
JP93  FIDUCIALUFIDUCIAL  [FIDUCIAL-MICRO]  111.25,57.4 0 top
JP94  FIDUCIALUFIDUCIAL  [FIDUCIAL-MICRO]  135.13,33.5 0 bottom
JP95  FIDUCIALUFIDUCIAL  [FIDUCIAL-MICRO]  111.25,57.4 0 bottom
JP96  STAND-OFF  [STAND-OFF]  113.03,35.31 0 top
JP97  LED  [SMT-JUMPER_2_NC_TRACE_SILK]  112.14,40.77 180 bottom
JP98  STAND-OFF  [STAND-OFF]  133.35,55.63 0 top
JP99  STAND-OFF  [STAND-OFF]  133.35,35.31 0 top
JP100  STAND-OFF  [STAND-OFF]  138.94,55.63 0 top
JP101  FIDUCIALUFIDUCIAL  [FIDUCIAL-MICRO]  161.04,33.5 0 top
JP102  FIDUCIALUFIDUCIAL  [FIDUCIAL-MICRO]  137.16,57.4 0 top
JP103  FIDUCIALUFIDUCIAL  [FIDUCIAL-MICRO]  161.04,33.5 0 bottom
JP104  FIDUCIALUFIDUCIAL  [FIDUCIAL-MICRO]  137.16,57.4 0 bottom
JP105  STAND-OFF  [STAND-OFF]  138.94,35.31 0 top
JP106  LED  [SMT-JUMPER_2_NC_TRACE_SILK]  138.05,40.77 180 bottom
JP107  STAND-OFF  [STAND-OFF]  159.26,55.63 0 top
JP108  STAND-OFF  [STAND-OFF]  159.26,35.31 0 top
JP109  STAND-OFF  [STAND-OFF]  9.4,81.53 0 top
JP110  FIDUCIALUFIDUCIAL  [FIDUCIAL-MICRO]  31.5,59.41 0 top
JP111  FIDUCIALUFIDUCIAL  [FIDUCIAL-MICRO]  7.62,83.31 0 top
JP112  FIDUCIALUFIDUCIAL  [FIDUCIAL-MICRO]  31.5,59.41 0 bottom
JP113  FIDUCIALUFIDUCIAL  [FIDUCIAL-MICRO]  7.62,83.31 0 bottom
JP114  STAND-OFF  [STAND-OFF]  9.4,61.21 0 top
JP115  LED  [SMT-JUMPER_2_NC_TRACE_SILK]  8.51,66.67 180 bottom
JP116  STAND-OFF  [STAND-OFF]  29.72,81.53 0 top
JP117  STAND-OFF  [STAND-OFF]  29.72,61.21 0 top
JP118  STAND-OFF  [STAND-OFF]  35.31,81.53 0 top
JP119  FIDUCIALUFIDUCIAL  [FIDUCIAL-MICRO]  57.4,59.41 0 top
JP120  FIDUCIALUFIDUCIAL  [FIDUCIAL-MICRO]  33.53,83.31 0 top
JP121  FIDUCIALUFIDUCIAL  [FIDUCIAL-MICRO]  57.4,59.41 0 bottom
JP122  FIDUCIALUFIDUCIAL  [FIDUCIAL-MICRO]  33.53,83.31 0 bottom
JP123  STAND-OFF  [STAND-OFF]  35.31,61.21 0 top
JP124  LED  [SMT-JUMPER_2_NC_TRACE_SILK]  34.42,66.67 180 bottom
JP125  STAND-OFF  [STAND-OFF]  55.63,81.53 0 top
JP126  STAND-OFF  [STAND-OFF]  55.63,61.21 0 top
JP127  STAND-OFF  [STAND-OFF]  61.21,81.53 0 top
JP128  FIDUCIALUFIDUCIAL  [FIDUCIAL-MICRO]  83.31,59.41 0 top
JP129  FIDUCIALUFIDUCIAL  [FIDUCIAL-MICRO]  59.44,83.31 0 top
JP130  FIDUCIALUFIDUCIAL  [FIDUCIAL-MICRO]  83.31,59.41 0 bottom
JP131  FIDUCIALUFIDUCIAL  [FIDUCIAL-MICRO]  59.44,83.31 0 bottom
JP132  STAND-OFF  [STAND-OFF]  61.21,61.21 0 top
JP133  LED  [SMT-JUMPER_2_NC_TRACE_SILK]  60.32,66.67 180 bottom
JP134  STAND-OFF  [STAND-OFF]  81.53,81.53 0 top
JP135  STAND-OFF  [STAND-OFF]  81.53,61.21 0 top
JP136  STAND-OFF  [STAND-OFF]  87.12,81.53 0 top
JP137  FIDUCIALUFIDUCIAL  [FIDUCIAL-MICRO]  109.22,59.41 0 top
JP138  FIDUCIALUFIDUCIAL  [FIDUCIAL-MICRO]  85.34,83.31 0 top
JP139  FIDUCIALUFIDUCIAL  [FIDUCIAL-MICRO]  109.22,59.41 0 bottom
JP140  FIDUCIALUFIDUCIAL  [FIDUCIAL-MICRO]  85.34,83.31 0 bottom
JP141  STAND-OFF  [STAND-OFF]  87.12,61.21 0 top
JP142  LED  [SMT-JUMPER_2_NC_TRACE_SILK]  86.23,66.67 180 bottom
JP143  STAND-OFF  [STAND-OFF]  107.44,81.53 0 top
JP144  STAND-OFF  [STAND-OFF]  107.44,61.21 0 top
JP145  STAND-OFF  [STAND-OFF]  113.03,81.53 0 top
JP146  FIDUCIALUFIDUCIAL  [FIDUCIAL-MICRO]  135.13,59.41 0 top
JP147  FIDUCIALUFIDUCIAL  [FIDUCIAL-MICRO]  111.25,83.31 0 top
JP148  FIDUCIALUFIDUCIAL  [FIDUCIAL-MICRO]  135.13,59.41 0 bottom
JP149  FIDUCIALUFIDUCIAL  [FIDUCIAL-MICRO]  111.25,83.31 0 bottom
JP150  STAND-OFF  [STAND-OFF]  113.03,61.21 0 top
JP151  LED  [SMT-JUMPER_2_NC_TRACE_SILK]  112.14,66.67 180 bottom
JP152  STAND-OFF  [STAND-OFF]  133.35,81.53 0 top
JP153  STAND-OFF  [STAND-OFF]  133.35,61.21 0 top
JP154  STAND-OFF  [STAND-OFF]  138.94,81.53 0 top
JP155  FIDUCIALUFIDUCIAL  [FIDUCIAL-MICRO]  161.04,59.41 0 top
JP156  FIDUCIALUFIDUCIAL  [FIDUCIAL-MICRO]  137.16,83.31 0 top
JP157  FIDUCIALUFIDUCIAL  [FIDUCIAL-MICRO]  161.04,59.41 0 bottom
JP158  FIDUCIALUFIDUCIAL  [FIDUCIAL-MICRO]  137.16,83.31 0 bottom
JP159  STAND-OFF  [STAND-OFF]  138.94,61.21 0 top
JP160  LED  [SMT-JUMPER_2_NC_TRACE_SILK]  138.05,66.67 180 bottom
JP161  STAND-OFF  [STAND-OFF]  159.26,81.53 0 top
JP162  STAND-OFF  [STAND-OFF]  159.26,61.21 0 top
JP163  STAND-OFF  [STAND-OFF]  9.4,107.44 0 top
JP164  FIDUCIALUFIDUCIAL  [FIDUCIAL-MICRO]  31.5,85.32 0 top
JP165  FIDUCIALUFIDUCIAL  [FIDUCIAL-MICRO]  7.62,109.22 0 top
JP166  FIDUCIALUFIDUCIAL  [FIDUCIAL-MICRO]  31.5,85.32 0 bottom
JP167  FIDUCIALUFIDUCIAL  [FIDUCIAL-MICRO]  7.62,109.22 0 bottom
JP168  STAND-OFF  [STAND-OFF]  9.4,87.12 0 top
JP169  LED  [SMT-JUMPER_2_NC_TRACE_SILK]  8.51,92.58 180 bottom
JP170  STAND-OFF  [STAND-OFF]  29.72,107.44 0 top
JP171  STAND-OFF  [STAND-OFF]  29.72,87.12 0 top
JP172  STAND-OFF  [STAND-OFF]  35.31,107.44 0 top
JP173  FIDUCIALUFIDUCIAL  [FIDUCIAL-MICRO]  57.4,85.32 0 top
JP174  FIDUCIALUFIDUCIAL  [FIDUCIAL-MICRO]  33.53,109.22 0 top
JP175  FIDUCIALUFIDUCIAL  [FIDUCIAL-MICRO]  57.4,85.32 0 bottom
JP176  FIDUCIALUFIDUCIAL  [FIDUCIAL-MICRO]  33.53,109.22 0 bottom
JP177  STAND-OFF  [STAND-OFF]  35.31,87.12 0 top
JP178  LED  [SMT-JUMPER_2_NC_TRACE_SILK]  34.42,92.58 180 bottom
JP179  STAND-OFF  [STAND-OFF]  55.63,107.44 0 top
JP180  STAND-OFF  [STAND-OFF]  55.63,87.12 0 top
JP181  STAND-OFF  [STAND-OFF]  61.21,107.44 0 top
JP182  FIDUCIALUFIDUCIAL  [FIDUCIAL-MICRO]  83.31,85.32 0 top
JP183  FIDUCIALUFIDUCIAL  [FIDUCIAL-MICRO]  59.44,109.22 0 top
JP184  FIDUCIALUFIDUCIAL  [FIDUCIAL-MICRO]  83.31,85.32 0 bottom
JP185  FIDUCIALUFIDUCIAL  [FIDUCIAL-MICRO]  59.44,109.22 0 bottom
JP186  STAND-OFF  [STAND-OFF]  61.21,87.12 0 top
JP187  LED  [SMT-JUMPER_2_NC_TRACE_SILK]  60.32,92.58 180 bottom
JP188  STAND-OFF  [STAND-OFF]  81.53,107.44 0 top
JP189  STAND-OFF  [STAND-OFF]  81.53,87.12 0 top
JP190  STAND-OFF  [STAND-OFF]  87.12,107.44 0 top
JP191  FIDUCIALUFIDUCIAL  [FIDUCIAL-MICRO]  109.22,85.32 0 top
JP192  FIDUCIALUFIDUCIAL  [FIDUCIAL-MICRO]  85.34,109.22 0 top
JP193  FIDUCIALUFIDUCIAL  [FIDUCIAL-MICRO]  109.22,85.32 0 bottom
JP194  FIDUCIALUFIDUCIAL  [FIDUCIAL-MICRO]  85.34,109.22 0 bottom
JP195  STAND-OFF  [STAND-OFF]  87.12,87.12 0 top
JP196  LED  [SMT-JUMPER_2_NC_TRACE_SILK]  86.23,92.58 180 bottom
JP197  STAND-OFF  [STAND-OFF]  107.44,107.44 0 top
JP198  STAND-OFF  [STAND-OFF]  107.44,87.12 0 top
JP199  STAND-OFF  [STAND-OFF]  113.03,107.44 0 top
JP200  FIDUCIALUFIDUCIAL  [FIDUCIAL-MICRO]  135.13,85.32 0 top
JP201  FIDUCIALUFIDUCIAL  [FIDUCIAL-MICRO]  111.25,109.22 0 top
JP202  FIDUCIALUFIDUCIAL  [FIDUCIAL-MICRO]  135.13,85.32 0 bottom
JP203  FIDUCIALUFIDUCIAL  [FIDUCIAL-MICRO]  111.25,109.22 0 bottom
JP204  STAND-OFF  [STAND-OFF]  113.03,87.12 0 top
JP205  LED  [SMT-JUMPER_2_NC_TRACE_SILK]  112.14,92.58 180 bottom
JP206  STAND-OFF  [STAND-OFF]  133.35,107.44 0 top
JP207  STAND-OFF  [STAND-OFF]  133.35,87.12 0 top
JP208  STAND-OFF  [STAND-OFF]  138.94,107.44 0 top
JP209  FIDUCIALUFIDUCIAL  [FIDUCIAL-MICRO]  161.04,85.32 0 top
JP210  FIDUCIALUFIDUCIAL  [FIDUCIAL-MICRO]  137.16,109.22 0 top
JP211  FIDUCIALUFIDUCIAL  [FIDUCIAL-MICRO]  161.04,85.32 0 bottom
JP212  FIDUCIALUFIDUCIAL  [FIDUCIAL-MICRO]  137.16,109.22 0 bottom
JP213  STAND-OFF  [STAND-OFF]  138.94,87.12 0 top
JP214  LED  [SMT-JUMPER_2_NC_TRACE_SILK]  138.05,92.58 180 bottom
JP215  STAND-OFF  [STAND-OFF]  159.26,107.44 0 top
JP216  STAND-OFF  [STAND-OFF]  159.26,87.12 0 top
LOGO1  OSHW-LOGOMINI  [OSHW-LOGO-MINI]  9.37,26.04 0 bottom
LOGO2  OSHW-LOGOMINI  [OSHW-LOGO-MINI]  35.28,26.04 0 bottom
LOGO3  SFE_LOGO_NAME_FLAME.1_INCH  [SFE_LOGO_NAME_FLAME_.1]  19.56,17.02 0 bottom
LOGO4  QWIIC_LOGO_5MM  [QWIIC_5MM]  9.65,24 0 top
LOGO5  SFE_LOGO_NAME_FLAME.1_INCH  [SFE_LOGO_NAME_FLAME_.1]  19.56,19.43 0 top
LOGO6  QWIIC_LOGO_5MM  [QWIIC_5MM]  35.56,24 0 top
LOGO7  SFE_LOGO_NAME_FLAME.1_INCH  [SFE_LOGO_NAME_FLAME_.1]  45.47,19.43 0 top
LOGO8  SFE_LOGO_NAME_FLAME.1_INCH  [SFE_LOGO_NAME_FLAME_.1]  45.47,17.02 0 bottom
LOGO9  OSHW-LOGOMINI  [OSHW-LOGO-MINI]  61.19,26.04 0 bottom
LOGO10  QWIIC_LOGO_5MM  [QWIIC_5MM]  61.47,24 0 top
LOGO11  SFE_LOGO_NAME_FLAME.1_INCH  [SFE_LOGO_NAME_FLAME_.1]  71.37,19.43 0 top
LOGO12  SFE_LOGO_NAME_FLAME.1_INCH  [SFE_LOGO_NAME_FLAME_.1]  71.37,17.02 0 bottom
LOGO13  OSHW-LOGOMINI  [OSHW-LOGO-MINI]  87.1,26.04 0 bottom
LOGO14  QWIIC_LOGO_5MM  [QWIIC_5MM]  87.38,24 0 top
LOGO15  SFE_LOGO_NAME_FLAME.1_INCH  [SFE_LOGO_NAME_FLAME_.1]  97.28,19.43 0 top
LOGO16  SFE_LOGO_NAME_FLAME.1_INCH  [SFE_LOGO_NAME_FLAME_.1]  97.28,17.02 0 bottom
LOGO17  OSHW-LOGOMINI  [OSHW-LOGO-MINI]  113,26.04 0 bottom
LOGO18  QWIIC_LOGO_5MM  [QWIIC_5MM]  113.28,24 0 top
LOGO19  SFE_LOGO_NAME_FLAME.1_INCH  [SFE_LOGO_NAME_FLAME_.1]  123.19,19.43 0 top
LOGO20  SFE_LOGO_NAME_FLAME.1_INCH  [SFE_LOGO_NAME_FLAME_.1]  123.19,17.02 0 bottom
LOGO21  OSHW-LOGOMINI  [OSHW-LOGO-MINI]  138.91,26.04 0 bottom
LOGO22  QWIIC_LOGO_5MM  [QWIIC_5MM]  139.19,24 0 top
LOGO23  SFE_LOGO_NAME_FLAME.1_INCH  [SFE_LOGO_NAME_FLAME_.1]  149.1,19.43 0 top
LOGO24  SFE_LOGO_NAME_FLAME.1_INCH  [SFE_LOGO_NAME_FLAME_.1]  149.1,17.02 0 bottom
LOGO25  OSHW-LOGOMINI  [OSHW-LOGO-MINI]  9.37,51.94 0 bottom
LOGO26  QWIIC_LOGO_5MM  [QWIIC_5MM]  9.65,49.91 0 top
LOGO27  SFE_LOGO_NAME_FLAME.1_INCH  [SFE_LOGO_NAME_FLAME_.1]  19.56,45.34 0 top
LOGO28  SFE_LOGO_NAME_FLAME.1_INCH  [SFE_LOGO_NAME_FLAME_.1]  19.56,42.93 0 bottom
LOGO29  OSHW-LOGOMINI  [OSHW-LOGO-MINI]  35.28,51.94 0 bottom
LOGO30  QWIIC_LOGO_5MM  [QWIIC_5MM]  35.56,49.91 0 top
LOGO31  SFE_LOGO_NAME_FLAME.1_INCH  [SFE_LOGO_NAME_FLAME_.1]  45.47,45.34 0 top
LOGO32  SFE_LOGO_NAME_FLAME.1_INCH  [SFE_LOGO_NAME_FLAME_.1]  45.47,42.93 0 bottom
LOGO33  OSHW-LOGOMINI  [OSHW-LOGO-MINI]  61.19,51.94 0 bottom
LOGO34  QWIIC_LOGO_5MM  [QWIIC_5MM]  61.47,49.91 0 top
LOGO35  SFE_LOGO_NAME_FLAME.1_INCH  [SFE_LOGO_NAME_FLAME_.1]  71.37,45.34 0 top
LOGO36  SFE_LOGO_NAME_FLAME.1_INCH  [SFE_LOGO_NAME_FLAME_.1]  71.37,42.93 0 bottom
LOGO37  OSHW-LOGOMINI  [OSHW-LOGO-MINI]  87.1,51.94 0 bottom
LOGO38  QWIIC_LOGO_5MM  [QWIIC_5MM]  87.38,49.91 0 top
LOGO39  SFE_LOGO_NAME_FLAME.1_INCH  [SFE_LOGO_NAME_FLAME_.1]  97.28,45.34 0 top
LOGO40  SFE_LOGO_NAME_FLAME.1_INCH  [SFE_LOGO_NAME_FLAME_.1]  97.28,42.93 0 bottom
LOGO41  OSHW-LOGOMINI  [OSHW-LOGO-MINI]  113,51.94 0 bottom
LOGO42  QWIIC_LOGO_5MM  [QWIIC_5MM]  113.28,49.91 0 top
LOGO43  SFE_LOGO_NAME_FLAME.1_INCH  [SFE_LOGO_NAME_FLAME_.1]  123.19,45.34 0 top
LOGO44  SFE_LOGO_NAME_FLAME.1_INCH  [SFE_LOGO_NAME_FLAME_.1]  123.19,42.93 0 bottom
LOGO45  OSHW-LOGOMINI  [OSHW-LOGO-MINI]  138.91,51.94 0 bottom
LOGO46  QWIIC_LOGO_5MM  [QWIIC_5MM]  139.19,49.91 0 top
LOGO47  SFE_LOGO_NAME_FLAME.1_INCH  [SFE_LOGO_NAME_FLAME_.1]  149.1,45.34 0 top
LOGO48  SFE_LOGO_NAME_FLAME.1_INCH  [SFE_LOGO_NAME_FLAME_.1]  149.1,42.93 0 bottom
LOGO49  OSHW-LOGOMINI  [OSHW-LOGO-MINI]  9.37,77.85 0 bottom
LOGO50  QWIIC_LOGO_5MM  [QWIIC_5MM]  9.65,75.82 0 top
LOGO51  SFE_LOGO_NAME_FLAME.1_INCH  [SFE_LOGO_NAME_FLAME_.1]  19.56,71.25 0 top
LOGO52  SFE_LOGO_NAME_FLAME.1_INCH  [SFE_LOGO_NAME_FLAME_.1]  19.56,68.83 0 bottom
LOGO53  OSHW-LOGOMINI  [OSHW-LOGO-MINI]  35.28,77.85 0 bottom
LOGO54  QWIIC_LOGO_5MM  [QWIIC_5MM]  35.56,75.82 0 top
LOGO55  SFE_LOGO_NAME_FLAME.1_INCH  [SFE_LOGO_NAME_FLAME_.1]  45.47,71.25 0 top
LOGO56  SFE_LOGO_NAME_FLAME.1_INCH  [SFE_LOGO_NAME_FLAME_.1]  45.47,68.83 0 bottom
LOGO57  OSHW-LOGOMINI  [OSHW-LOGO-MINI]  61.19,77.85 0 bottom
LOGO58  QWIIC_LOGO_5MM  [QWIIC_5MM]  61.47,75.82 0 top
LOGO59  SFE_LOGO_NAME_FLAME.1_INCH  [SFE_LOGO_NAME_FLAME_.1]  71.37,71.25 0 top
LOGO60  SFE_LOGO_NAME_FLAME.1_INCH  [SFE_LOGO_NAME_FLAME_.1]  71.37,68.83 0 bottom
LOGO61  OSHW-LOGOMINI  [OSHW-LOGO-MINI]  87.1,77.85 0 bottom
LOGO62  QWIIC_LOGO_5MM  [QWIIC_5MM]  87.38,75.82 0 top
LOGO63  SFE_LOGO_NAME_FLAME.1_INCH  [SFE_LOGO_NAME_FLAME_.1]  97.28,71.25 0 top
LOGO64  SFE_LOGO_NAME_FLAME.1_INCH  [SFE_LOGO_NAME_FLAME_.1]  97.28,68.83 0 bottom
LOGO65  OSHW-LOGOMINI  [OSHW-LOGO-MINI]  113,77.85 0 bottom
LOGO66  QWIIC_LOGO_5MM  [QWIIC_5MM]  113.28,75.82 0 top
LOGO67  SFE_LOGO_NAME_FLAME.1_INCH  [SFE_LOGO_NAME_FLAME_.1]  123.19,71.25 0 top
LOGO68  SFE_LOGO_NAME_FLAME.1_INCH  [SFE_LOGO_NAME_FLAME_.1]  123.19,68.83 0 bottom
LOGO69  OSHW-LOGOMINI  [OSHW-LOGO-MINI]  138.91,77.85 0 bottom
LOGO70  QWIIC_LOGO_5MM  [QWIIC_5MM]  139.19,75.82 0 top
LOGO71  SFE_LOGO_NAME_FLAME.1_INCH  [SFE_LOGO_NAME_FLAME_.1]  149.1,71.25 0 top
LOGO72  SFE_LOGO_NAME_FLAME.1_INCH  [SFE_LOGO_NAME_FLAME_.1]  149.1,68.83 0 bottom
LOGO73  OSHW-LOGOMINI  [OSHW-LOGO-MINI]  9.37,103.76 0 bottom
LOGO74  QWIIC_LOGO_5MM  [QWIIC_5MM]  9.65,101.73 0 top
LOGO75  SFE_LOGO_NAME_FLAME.1_INCH  [SFE_LOGO_NAME_FLAME_.1]  19.56,97.16 0 top
LOGO76  SFE_LOGO_NAME_FLAME.1_INCH  [SFE_LOGO_NAME_FLAME_.1]  19.56,94.74 0 bottom
LOGO77  OSHW-LOGOMINI  [OSHW-LOGO-MINI]  35.28,103.76 0 bottom
LOGO78  QWIIC_LOGO_5MM  [QWIIC_5MM]  35.56,101.73 0 top
LOGO79  SFE_LOGO_NAME_FLAME.1_INCH  [SFE_LOGO_NAME_FLAME_.1]  45.47,97.16 0 top
LOGO80  SFE_LOGO_NAME_FLAME.1_INCH  [SFE_LOGO_NAME_FLAME_.1]  45.47,94.74 0 bottom
LOGO81  OSHW-LOGOMINI  [OSHW-LOGO-MINI]  61.19,103.76 0 bottom
LOGO82  QWIIC_LOGO_5MM  [QWIIC_5MM]  61.47,101.73 0 top
LOGO83  SFE_LOGO_NAME_FLAME.1_INCH  [SFE_LOGO_NAME_FLAME_.1]  71.37,97.16 0 top
LOGO84  SFE_LOGO_NAME_FLAME.1_INCH  [SFE_LOGO_NAME_FLAME_.1]  71.37,94.74 0 bottom
LOGO85  OSHW-LOGOMINI  [OSHW-LOGO-MINI]  87.1,103.76 0 bottom
LOGO86  QWIIC_LOGO_5MM  [QWIIC_5MM]  87.38,101.73 0 top
LOGO87  SFE_LOGO_NAME_FLAME.1_INCH  [SFE_LOGO_NAME_FLAME_.1]  97.28,97.16 0 top
LOGO88  SFE_LOGO_NAME_FLAME.1_INCH  [SFE_LOGO_NAME_FLAME_.1]  97.28,94.74 0 bottom
LOGO89  OSHW-LOGOMINI  [OSHW-LOGO-MINI]  113,103.76 0 bottom
LOGO90  QWIIC_LOGO_5MM  [QWIIC_5MM]  113.28,101.73 0 top
LOGO91  SFE_LOGO_NAME_FLAME.1_INCH  [SFE_LOGO_NAME_FLAME_.1]  123.19,97.16 0 top
LOGO92  SFE_LOGO_NAME_FLAME.1_INCH  [SFE_LOGO_NAME_FLAME_.1]  123.19,94.74 0 bottom
LOGO93  OSHW-LOGOMINI  [OSHW-LOGO-MINI]  138.91,103.76 0 bottom
LOGO94  QWIIC_LOGO_5MM  [QWIIC_5MM]  139.19,101.73 0 top
LOGO95  SFE_LOGO_NAME_FLAME.1_INCH  [SFE_LOGO_NAME_FLAME_.1]  149.1,97.16 0 top
LOGO96  SFE_LOGO_NAME_FLAME.1_INCH  [SFE_LOGO_NAME_FLAME_.1]  149.1,94.74 0 bottom
R1  2.2k  [0402-TIGHT]  54.36,14.48 0 top
R2  2.2k  [0402-TIGHT]  54.36,13.21 0 top
R3  2.2k  [0402-TIGHT]  28.45,13.21 0 top
R4  2.2k  [0402-TIGHT]  28.45,14.48 0 top
R5  1k  [0402-TIGHT]  11.89,13.41 90 top
R6  1k  [0402-TIGHT]  37.8,13.41 90 top
R7  2.2k  [0402-TIGHT]  80.26,14.48 0 top
R8  2.2k  [0402-TIGHT]  80.26,13.21 0 top
R9  1k  [0402-TIGHT]  63.7,13.41 90 top
R10  2.2k  [0402-TIGHT]  106.17,14.48 0 top
R11  2.2k  [0402-TIGHT]  106.17,13.21 0 top
R12  1k  [0402-TIGHT]  89.61,13.41 90 top
R13  2.2k  [0402-TIGHT]  132.08,14.48 0 top
R14  2.2k  [0402-TIGHT]  132.08,13.21 0 top
R15  1k  [0402-TIGHT]  115.52,13.41 90 top
R16  2.2k  [0402-TIGHT]  157.99,14.48 0 top
R17  2.2k  [0402-TIGHT]  157.99,13.21 0 top
R18  1k  [0402-TIGHT]  141.43,13.41 90 top
R19  2.2k  [0402-TIGHT]  28.45,40.39 0 top
R20  2.2k  [0402-TIGHT]  28.45,39.12 0 top
R21  1k  [0402-TIGHT]  11.89,39.32 90 top
R22  2.2k  [0402-TIGHT]  54.36,40.39 0 top
R23  2.2k  [0402-TIGHT]  54.36,39.12 0 top
R24  1k  [0402-TIGHT]  37.8,39.32 90 top
R25  2.2k  [0402-TIGHT]  80.26,40.39 0 top
R26  2.2k  [0402-TIGHT]  80.26,39.12 0 top
R27  1k  [0402-TIGHT]  63.7,39.32 90 top
R28  2.2k  [0402-TIGHT]  106.17,40.39 0 top
R29  2.2k  [0402-TIGHT]  106.17,39.12 0 top
R30  1k  [0402-TIGHT]  89.61,39.32 90 top
R31  2.2k  [0402-TIGHT]  132.08,40.39 0 top
R32  2.2k  [0402-TIGHT]  132.08,39.12 0 top
R33  1k  [0402-TIGHT]  115.52,39.32 90 top
R34  2.2k  [0402-TIGHT]  157.99,40.39 0 top
R35  2.2k  [0402-TIGHT]  157.99,39.12 0 top
R36  1k  [0402-TIGHT]  141.43,39.32 90 top
R37  2.2k  [0402-TIGHT]  28.45,66.29 0 top
R38  2.2k  [0402-TIGHT]  28.45,65.02 0 top
R39  1k  [0402-TIGHT]  11.89,65.23 90 top
R40  2.2k  [0402-TIGHT]  54.36,66.29 0 top
R41  2.2k  [0402-TIGHT]  54.36,65.02 0 top
R42  1k  [0402-TIGHT]  37.8,65.23 90 top
R43  2.2k  [0402-TIGHT]  80.26,66.29 0 top
R44  2.2k  [0402-TIGHT]  80.26,65.02 0 top
R45  1k  [0402-TIGHT]  63.7,65.23 90 top
R46  2.2k  [0402-TIGHT]  106.17,66.29 0 top
R47  2.2k  [0402-TIGHT]  106.17,65.02 0 top
R48  1k  [0402-TIGHT]  89.61,65.23 90 top
R49  2.2k  [0402-TIGHT]  132.08,66.29 0 top
R50  2.2k  [0402-TIGHT]  132.08,65.02 0 top
R51  1k  [0402-TIGHT]  115.52,65.23 90 top
R52  2.2k  [0402-TIGHT]  157.99,66.29 0 top
R53  2.2k  [0402-TIGHT]  157.99,65.02 0 top
R54  1k  [0402-TIGHT]  141.43,65.23 90 top
R55  2.2k  [0402-TIGHT]  28.45,92.2 0 top
R56  2.2k  [0402-TIGHT]  28.45,90.93 0 top
R57  1k  [0402-TIGHT]  11.89,91.14 90 top
R58  2.2k  [0402-TIGHT]  54.36,92.2 0 top
R59  2.2k  [0402-TIGHT]  54.36,90.93 0 top
R60  1k  [0402-TIGHT]  37.8,91.14 90 top
R61  2.2k  [0402-TIGHT]  80.26,92.2 0 top
R62  2.2k  [0402-TIGHT]  80.26,90.93 0 top
R63  1k  [0402-TIGHT]  63.7,91.14 90 top
R64  2.2k  [0402-TIGHT]  106.17,92.2 0 top
R65  2.2k  [0402-TIGHT]  106.17,90.93 0 top
R66  1k  [0402-TIGHT]  89.61,91.14 90 top
R67  2.2k  [0402-TIGHT]  132.08,92.2 0 top
R68  2.2k  [0402-TIGHT]  132.08,90.93 0 top
R69  1k  [0402-TIGHT]  115.52,91.14 90 top
R70  2.2k  [0402-TIGHT]  157.99,92.2 0 top
R71  2.2k  [0402-TIGHT]  157.99,90.93 0 top
R72  1k  [0402-TIGHT]  141.43,91.14 90 top
U1  FS3000  [FS3000]  19.56,27.69 0 top
U2  FS3000  [FS3000]  45.47,27.69 0 top
U3  FS3000  [FS3000]  71.37,27.69 0 top
U4  FS3000  [FS3000]  97.28,27.69 0 top
U5  FS3000  [FS3000]  123.19,27.69 0 top
U6  FS3000  [FS3000]  149.1,27.69 0 top
U7  FS3000  [FS3000]  19.56,53.59 0 top
U8  FS3000  [FS3000]  45.47,53.59 0 top
U9  FS3000  [FS3000]  71.37,53.59 0 top
U10  FS3000  [FS3000]  97.28,53.59 0 top
U11  FS3000  [FS3000]  123.19,53.59 0 top
U12  FS3000  [FS3000]  149.1,53.59 0 top
U13  FS3000  [FS3000]  19.56,79.5 0 top
U14  FS3000  [FS3000]  45.47,79.5 0 top
U15  FS3000  [FS3000]  71.37,79.5 0 top
U16  FS3000  [FS3000]  97.28,79.5 0 top
U17  FS3000  [FS3000]  123.19,79.5 0 top
U18  FS3000  [FS3000]  149.1,79.5 0 top
U19  FS3000  [FS3000]  19.56,105.41 0 top
U20  FS3000  [FS3000]  45.47,105.41 0 top
U21  FS3000  [FS3000]  71.37,105.41 0 top
U22  FS3000  [FS3000]  97.28,105.41 0 top
U23  FS3000  [FS3000]  123.19,105.41 0 top
U24  FS3000  [FS3000]  149.1,105.41 0 top
U$1  [#GND#0]  39.12,8.64 90 top
U$2  [#GND#0]  39.12,8.64 90 bottom
U$3  [#SCL#0]  20.83,8.64 90 bottom
U$4  [#SDA#0]  18.29,8.64 90 bottom
U$5  [#GND#0]  13.21,8.64 90 top
U$6  [#GND#0]  13.21,8.64 90 bottom
U$7  [#3#3V#0]  15.75,8.64 90 top
U$8  [#3#3V#0]  15.75,8.64 90 bottom
U$9  [#SDA#0]  18.29,8.64 90 top
U$10  [#ADCR#4]  25.91,8.51 90 top
U$11  [#SCL#0]  20.83,8.64 90 top
U$12  [10050]  30.23,26.29 0 top
U$13  [#ADCR#4]  25.91,8.51 90 bottom
U$14  [FS30001]  19.43,14.22 0 top
U$15  [#ADC#REF#0]  13.21,30.1 90 bottom
U$16  [VELOCITY30003]  20.95,17.14 0 top
U$17  [FS30001]  25.91,22.1 0 bottom
U$18  [AIR30004]  16.13,17.14 0 top
U$19  [SENSOR30005]  19.43,15.75 0 top
U$20  [VELOCITY30003]  25.76,24.99 0 bottom
U$21  [AIR30004]  25.63,26.39 0 bottom
U$22  [SENSOR30005]  25.91,23.65 0 bottom
U$23  [#AIRFLOW#0]  25.93,26.82 90 top
U$24  [#LED#0]  8.51,15.49 90 bottom
U$25  [PWR0]  9.5,14.71 0 top
U$26  [#AIRFLOW#0]  19.53,26.77 90 bottom
U$27  [#I2C#0]  29.13,15.24 90 bottom
U$28  [I2C_ADD#_0X280]  26.04,20.57 0 bottom
U$29  [10150]  30.1,24.64 0 top
U$30  [#VCM#3]  23.37,8.51 90 top
U$31  [#VCM#3]  23.37,8.51 90 bottom
U$32  [#3#3V#0]  41.66,8.64 90 top
U$33  [#3#3V#0]  41.66,8.64 90 bottom
U$34  [#SDA#0]  44.2,8.64 90 top
U$35  [#SCL#0]  46.74,8.64 90 top
U$36  [#LED#0]  34.42,15.49 90 bottom
U$37  [PWR0]  35.41,14.71 0 top
U$38  [#I2C#0]  55.04,15.24 90 bottom
U$39  [#SCL#0]  46.74,8.64 90 bottom
U$40  [#SDA#0]  44.2,8.64 90 bottom
U$41  [FS30001]  45.34,14.22 0 top
U$42  [VELOCITY30003]  46.86,17.14 0 top
U$43  [AIR30004]  42.04,17.14 0 top
U$44  [SENSOR30005]  45.34,15.75 0 top
U$45  [#ADC#REF#0]  39.12,30.1 90 bottom
U$46  [FS30001]  51.82,22.1 0 bottom
U$47  [VELOCITY30003]  51.66,24.99 0 bottom
U$48  [AIR30004]  51.54,26.39 0 bottom
U$49  [SENSOR30005]  51.82,23.65 0 bottom
U$50  [#AIRFLOW#0]  51.84,26.82 90 top
U$51  [#AIRFLOW#0]  45.44,26.77 90 bottom
U$52  [I2C_ADD#_0X280]  51.94,20.57 0 bottom
U$53  [10050]  56.13,26.29 0 top
U$54  [10150]  56.01,24.64 0 top
U$55  [#ADCR#4]  51.82,8.51 90 top
U$56  [#ADCR#4]  51.82,8.51 90 bottom
U$57  [#VCM#3]  49.28,8.51 90 top
U$58  [#VCM#3]  49.28,8.51 90 bottom
U$59  [#GND#0]  65.02,8.64 90 top
U$60  [#GND#0]  65.02,8.64 90 bottom
U$61  [#3#3V#0]  67.56,8.64 90 top
U$62  [#3#3V#0]  67.56,8.64 90 bottom
U$63  [#SDA#0]  70.1,8.64 90 top
U$64  [#SCL#0]  72.64,8.64 90 top
U$65  [#LED#0]  60.32,15.49 90 bottom
U$66  [PWR0]  61.32,14.71 0 top
U$67  [#I2C#0]  80.95,15.24 90 bottom
U$68  [#SCL#0]  72.64,8.64 90 bottom
U$69  [#SDA#0]  70.1,8.64 90 bottom
U$70  [FS30001]  71.25,14.22 0 top
U$71  [VELOCITY30003]  72.77,17.14 0 top
U$72  [AIR30004]  67.95,17.14 0 top
U$73  [SENSOR30005]  71.25,15.75 0 top
U$74  [#ADC#REF#0]  65.02,30.1 90 bottom
U$75  [FS30001]  77.72,22.1 0 bottom
U$76  [VELOCITY30003]  77.57,24.99 0 bottom
U$77  [AIR30004]  77.44,26.39 0 bottom
U$78  [SENSOR30005]  77.72,23.65 0 bottom
U$79  [#AIRFLOW#0]  77.75,26.82 90 top
U$80  [#AIRFLOW#0]  71.35,26.77 90 bottom
U$81  [I2C_ADD#_0X280]  77.85,20.57 0 bottom
U$82  [10050]  82.04,26.29 0 top
U$83  [10150]  81.92,24.64 0 top
U$84  [#ADCR#4]  77.72,8.51 90 top
U$85  [#ADCR#4]  77.72,8.51 90 bottom
U$86  [#VCM#3]  75.18,8.51 90 top
U$87  [#VCM#3]  75.18,8.51 90 bottom
U$88  [#GND#0]  90.93,8.64 90 top
U$89  [#GND#0]  90.93,8.64 90 bottom
U$90  [#3#3V#0]  93.47,8.64 90 top
U$91  [#3#3V#0]  93.47,8.64 90 bottom
U$92  [#SDA#0]  96.01,8.64 90 top
U$93  [#SCL#0]  98.55,8.64 90 top
U$94  [#LED#0]  86.23,15.49 90 bottom
U$95  [PWR0]  87.22,14.71 0 top
U$96  [#I2C#0]  106.86,15.24 90 bottom
U$97  [#SCL#0]  98.55,8.64 90 bottom
U$98  [#SDA#0]  96.01,8.64 90 bottom
U$99  [FS30001]  97.16,14.22 0 top
U$100  [VELOCITY30003]  98.68,17.14 0 top
U$101  [AIR30004]  93.85,17.14 0 top
U$102  [SENSOR30005]  97.16,15.75 0 top
U$103  [#ADC#REF#0]  90.93,30.1 90 bottom
U$104  [FS30001]  103.63,22.1 0 bottom
U$105  [VELOCITY30003]  103.48,24.99 0 bottom
U$106  [AIR30004]  103.35,26.39 0 bottom
U$107  [SENSOR30005]  103.63,23.65 0 bottom
U$108  [#AIRFLOW#0]  103.66,26.82 90 top
U$109  [#AIRFLOW#0]  97.26,26.77 90 bottom
U$110  [I2C_ADD#_0X280]  103.76,20.57 0 bottom
U$111  [10050]  107.95,26.29 0 top
U$112  [10150]  107.82,24.64 0 top
U$113  [#ADCR#4]  103.63,8.51 90 top
U$114  [#ADCR#4]  103.63,8.51 90 bottom
U$115  [#VCM#3]  101.09,8.51 90 top
U$116  [#VCM#3]  101.09,8.51 90 bottom
U$117  [#GND#0]  116.84,8.64 90 top
U$118  [#GND#0]  116.84,8.64 90 bottom
U$119  [#3#3V#0]  119.38,8.64 90 top
U$120  [#3#3V#0]  119.38,8.64 90 bottom
U$121  [#SDA#0]  121.92,8.64 90 top
U$122  [#SCL#0]  124.46,8.64 90 top
U$123  [#LED#0]  112.14,15.49 90 bottom
U$124  [PWR0]  113.13,14.71 0 top
U$125  [#I2C#0]  132.77,15.24 90 bottom
U$126  [#SCL#0]  124.46,8.64 90 bottom
U$127  [#SDA#0]  121.92,8.64 90 bottom
U$128  [FS30001]  123.06,14.22 0 top
U$129  [VELOCITY30003]  124.59,17.14 0 top
U$130  [AIR30004]  119.76,17.14 0 top
U$131  [SENSOR30005]  123.06,15.75 0 top
U$132  [#ADC#REF#0]  116.84,30.1 90 bottom
U$133  [FS30001]  129.54,22.1 0 bottom
U$134  [VELOCITY30003]  129.39,24.99 0 bottom
U$135  [AIR30004]  129.26,26.39 0 bottom
U$136  [SENSOR30005]  129.54,23.65 0 bottom
U$137  [#AIRFLOW#0]  129.57,26.82 90 top
U$138  [#AIRFLOW#0]  123.16,26.77 90 bottom
U$139  [I2C_ADD#_0X280]  129.67,20.57 0 bottom
U$140  [10050]  133.86,26.29 0 top
U$141  [10150]  133.73,24.64 0 top
U$142  [#ADCR#4]  129.54,8.51 90 top
U$143  [#ADCR#4]  129.54,8.51 90 bottom
U$144  [#VCM#3]  127,8.51 90 top
U$145  [#VCM#3]  127,8.51 90 bottom
U$146  [#GND#0]  142.75,8.64 90 top
U$147  [#GND#0]  142.75,8.64 90 bottom
U$148  [#3#3V#0]  145.29,8.64 90 top
U$149  [#3#3V#0]  145.29,8.64 90 bottom
U$150  [#SDA#0]  147.83,8.64 90 top
U$151  [#SCL#0]  150.37,8.64 90 top
U$152  [#LED#0]  138.05,15.49 90 bottom
U$153  [PWR0]  139.04,14.71 0 top
U$154  [#I2C#0]  158.67,15.24 90 bottom
U$155  [#SCL#0]  150.37,8.64 90 bottom
U$156  [#SDA#0]  147.83,8.64 90 bottom
U$157  [FS30001]  148.97,14.22 0 top
U$158  [VELOCITY30003]  150.5,17.14 0 top
U$159  [AIR30004]  145.67,17.14 0 top
U$160  [SENSOR30005]  148.97,15.75 0 top
U$161  [#ADC#REF#0]  142.75,30.1 90 bottom
U$162  [FS30001]  155.45,22.1 0 bottom
U$163  [VELOCITY30003]  155.3,24.99 0 bottom
U$164  [AIR30004]  155.17,26.39 0 bottom
U$165  [SENSOR30005]  155.45,23.65 0 bottom
U$166  [#AIRFLOW#0]  155.47,26.82 90 top
U$167  [#AIRFLOW#0]  149.07,26.77 90 bottom
U$168  [I2C_ADD#_0X280]  155.58,20.57 0 bottom
U$169  [10050]  159.77,26.29 0 top
U$170  [10150]  159.64,24.64 0 top
U$171  [#ADCR#4]  155.45,8.51 90 top
U$172  [#ADCR#4]  155.45,8.51 90 bottom
U$173  [#VCM#3]  152.91,8.51 90 top
U$174  [#VCM#3]  152.91,8.51 90 bottom
U$175  [#GND#0]  13.21,34.54 90 top
U$176  [#GND#0]  13.21,34.54 90 bottom
U$177  [#3#3V#0]  15.75,34.54 90 top
U$178  [#3#3V#0]  15.75,34.54 90 bottom
U$179  [#SDA#0]  18.29,34.54 90 top
U$180  [#SCL#0]  20.83,34.54 90 top
U$181  [#LED#0]  8.51,41.4 90 bottom
U$182  [PWR0]  9.5,40.61 0 top
U$183  [#I2C#0]  29.13,41.15 90 bottom
U$184  [#SCL#0]  20.83,34.54 90 bottom
U$185  [#SDA#0]  18.29,34.54 90 bottom
U$186  [FS30001]  19.43,40.13 0 top
U$187  [VELOCITY30003]  20.95,43.05 0 top
U$188  [AIR30004]  16.13,43.05 0 top
U$189  [SENSOR30005]  19.43,41.66 0 top
U$190  [#ADC#REF#0]  13.21,56.01 90 bottom
U$191  [FS30001]  25.91,48.01 0 bottom
U$192  [VELOCITY30003]  25.76,50.9 0 bottom
U$193  [AIR30004]  25.63,52.3 0 bottom
U$194  [SENSOR30005]  25.91,49.56 0 bottom
U$195  [#AIRFLOW#0]  25.93,52.73 90 top
U$196  [#AIRFLOW#0]  19.53,52.68 90 bottom
U$197  [I2C_ADD#_0X280]  26.04,46.48 0 bottom
U$198  [10050]  30.23,52.2 0 top
U$199  [10150]  30.1,50.55 0 top
U$200  [#ADCR#4]  25.91,34.42 90 top
U$201  [#ADCR#4]  25.91,34.42 90 bottom
U$202  [#VCM#3]  23.37,34.42 90 top
U$203  [#VCM#3]  23.37,34.42 90 bottom
U$204  [#GND#0]  39.12,34.54 90 top
U$205  [#GND#0]  39.12,34.54 90 bottom
U$206  [#3#3V#0]  41.66,34.54 90 top
U$207  [#3#3V#0]  41.66,34.54 90 bottom
U$208  [#SDA#0]  44.2,34.54 90 top
U$209  [#SCL#0]  46.74,34.54 90 top
U$210  [#LED#0]  34.42,41.4 90 bottom
U$211  [PWR0]  35.41,40.61 0 top
U$212  [#I2C#0]  55.04,41.15 90 bottom
U$213  [#SCL#0]  46.74,34.54 90 bottom
U$214  [#SDA#0]  44.2,34.54 90 bottom
U$215  [FS30001]  45.34,40.13 0 top
U$216  [VELOCITY30003]  46.86,43.05 0 top
U$217  [AIR30004]  42.04,43.05 0 top
U$218  [SENSOR30005]  45.34,41.66 0 top
U$219  [#ADC#REF#0]  39.12,56.01 90 bottom
U$220  [FS30001]  51.82,48.01 0 bottom
U$221  [VELOCITY30003]  51.66,50.9 0 bottom
U$222  [AIR30004]  51.54,52.3 0 bottom
U$223  [SENSOR30005]  51.82,49.56 0 bottom
U$224  [#AIRFLOW#0]  51.84,52.73 90 top
U$225  [#AIRFLOW#0]  45.44,52.68 90 bottom
U$226  [I2C_ADD#_0X280]  51.94,46.48 0 bottom
U$227  [10050]  56.13,52.2 0 top
U$228  [10150]  56.01,50.55 0 top
U$229  [#ADCR#4]  51.82,34.42 90 top
U$230  [#ADCR#4]  51.82,34.42 90 bottom
U$231  [#VCM#3]  49.28,34.42 90 top
U$232  [#VCM#3]  49.28,34.42 90 bottom
U$233  [#GND#0]  65.02,34.54 90 top
U$234  [#GND#0]  65.02,34.54 90 bottom
U$235  [#3#3V#0]  67.56,34.54 90 top
U$236  [#3#3V#0]  67.56,34.54 90 bottom
U$237  [#SDA#0]  70.1,34.54 90 top
U$238  [#SCL#0]  72.64,34.54 90 top
U$239  [#LED#0]  60.32,41.4 90 bottom
U$240  [PWR0]  61.32,40.61 0 top
U$241  [#I2C#0]  80.95,41.15 90 bottom
U$242  [#SCL#0]  72.64,34.54 90 bottom
U$243  [#SDA#0]  70.1,34.54 90 bottom
U$244  [FS30001]  71.25,40.13 0 top
U$245  [VELOCITY30003]  72.77,43.05 0 top
U$246  [AIR30004]  67.95,43.05 0 top
U$247  [SENSOR30005]  71.25,41.66 0 top
U$248  [#ADC#REF#0]  65.02,56.01 90 bottom
U$249  [FS30001]  77.72,48.01 0 bottom
U$250  [VELOCITY30003]  77.57,50.9 0 bottom
U$251  [AIR30004]  77.44,52.3 0 bottom
U$252  [SENSOR30005]  77.72,49.56 0 bottom
U$253  [#AIRFLOW#0]  77.75,52.73 90 top
U$254  [#AIRFLOW#0]  71.35,52.68 90 bottom
U$255  [I2C_ADD#_0X280]  77.85,46.48 0 bottom
U$256  [10050]  82.04,52.2 0 top
U$257  [10150]  81.92,50.55 0 top
U$258  [#ADCR#4]  77.72,34.42 90 top
U$259  [#ADCR#4]  77.72,34.42 90 bottom
U$260  [#VCM#3]  75.18,34.42 90 top
U$261  [#VCM#3]  75.18,34.42 90 bottom
U$262  [#GND#0]  90.93,34.54 90 top
U$263  [#GND#0]  90.93,34.54 90 bottom
U$264  [#3#3V#0]  93.47,34.54 90 top
U$265  [#3#3V#0]  93.47,34.54 90 bottom
U$266  [#SDA#0]  96.01,34.54 90 top
U$267  [#SCL#0]  98.55,34.54 90 top
U$268  [#LED#0]  86.23,41.4 90 bottom
U$269  [PWR0]  87.22,40.61 0 top
U$270  [#I2C#0]  106.86,41.15 90 bottom
U$271  [#SCL#0]  98.55,34.54 90 bottom
U$272  [#SDA#0]  96.01,34.54 90 bottom
U$273  [FS30001]  97.16,40.13 0 top
U$274  [VELOCITY30003]  98.68,43.05 0 top
U$275  [AIR30004]  93.85,43.05 0 top
U$276  [SENSOR30005]  97.16,41.66 0 top
U$277  [#ADC#REF#0]  90.93,56.01 90 bottom
U$278  [FS30001]  103.63,48.01 0 bottom
U$279  [VELOCITY30003]  103.48,50.9 0 bottom
U$280  [AIR30004]  103.35,52.3 0 bottom
U$281  [SENSOR30005]  103.63,49.56 0 bottom
U$282  [#AIRFLOW#0]  103.66,52.73 90 top
U$283  [#AIRFLOW#0]  97.26,52.68 90 bottom
U$284  [I2C_ADD#_0X280]  103.76,46.48 0 bottom
U$285  [10050]  107.95,52.2 0 top
U$286  [10150]  107.82,50.55 0 top
U$287  [#ADCR#4]  103.63,34.42 90 top
U$288  [#ADCR#4]  103.63,34.42 90 bottom
U$289  [#VCM#3]  101.09,34.42 90 top
U$290  [#VCM#3]  101.09,34.42 90 bottom
U$291  [#GND#0]  116.84,34.54 90 top
U$292  [#GND#0]  116.84,34.54 90 bottom
U$293  [#3#3V#0]  119.38,34.54 90 top
U$294  [#3#3V#0]  119.38,34.54 90 bottom
U$295  [#SDA#0]  121.92,34.54 90 top
U$296  [#SCL#0]  124.46,34.54 90 top
U$297  [#LED#0]  112.14,41.4 90 bottom
U$298  [PWR0]  113.13,40.61 0 top
U$299  [#I2C#0]  132.77,41.15 90 bottom
U$300  [#SCL#0]  124.46,34.54 90 bottom
U$301  [#SDA#0]  121.92,34.54 90 bottom
U$302  [FS30001]  123.06,40.13 0 top
U$303  [VELOCITY30003]  124.59,43.05 0 top
U$304  [AIR30004]  119.76,43.05 0 top
U$305  [SENSOR30005]  123.06,41.66 0 top
U$306  [#ADC#REF#0]  116.84,56.01 90 bottom
U$307  [FS30001]  129.54,48.01 0 bottom
U$308  [VELOCITY30003]  129.39,50.9 0 bottom
U$309  [AIR30004]  129.26,52.3 0 bottom
U$310  [SENSOR30005]  129.54,49.56 0 bottom
U$311  [#AIRFLOW#0]  129.57,52.73 90 top
U$312  [#AIRFLOW#0]  123.16,52.68 90 bottom
U$313  [I2C_ADD#_0X280]  129.67,46.48 0 bottom
U$314  [10050]  133.86,52.2 0 top
U$315  [10150]  133.73,50.55 0 top